# Altium PCB MCU_PCB_1.PcbDoc
Units mil, origin at the board's own origin, x right, y up, seen from the top; angles counter-clockwise.
Board outline 2799.21 x 3602.36 mil, 4 copper layers (Top Layer, Plane (+3.3V), Plane (GND), Bottom Layer), stack 23.756 mil thick; 72 components, 40 nets, 258 pads, 91 vias.
Unrouted connection lines stored in the file: 2.
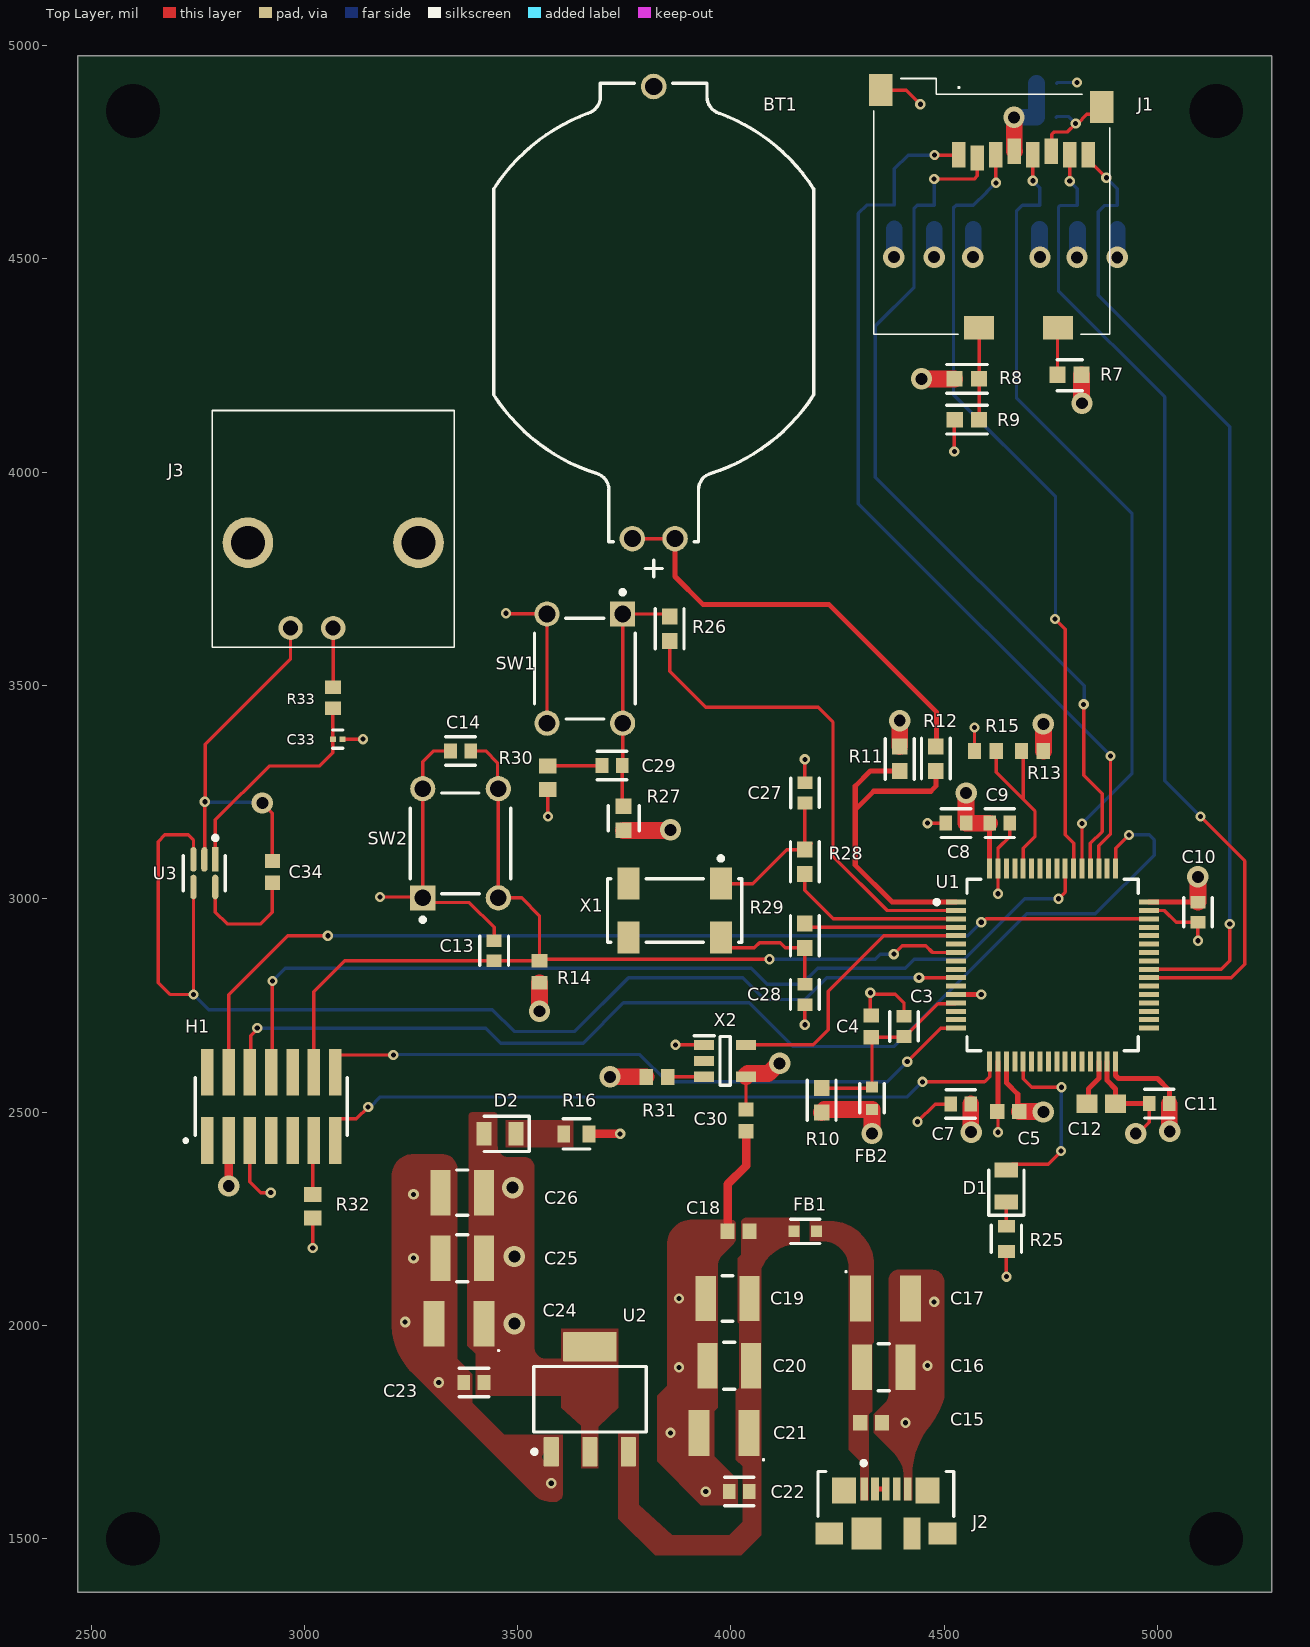
[diagram p0: Top Layer view]
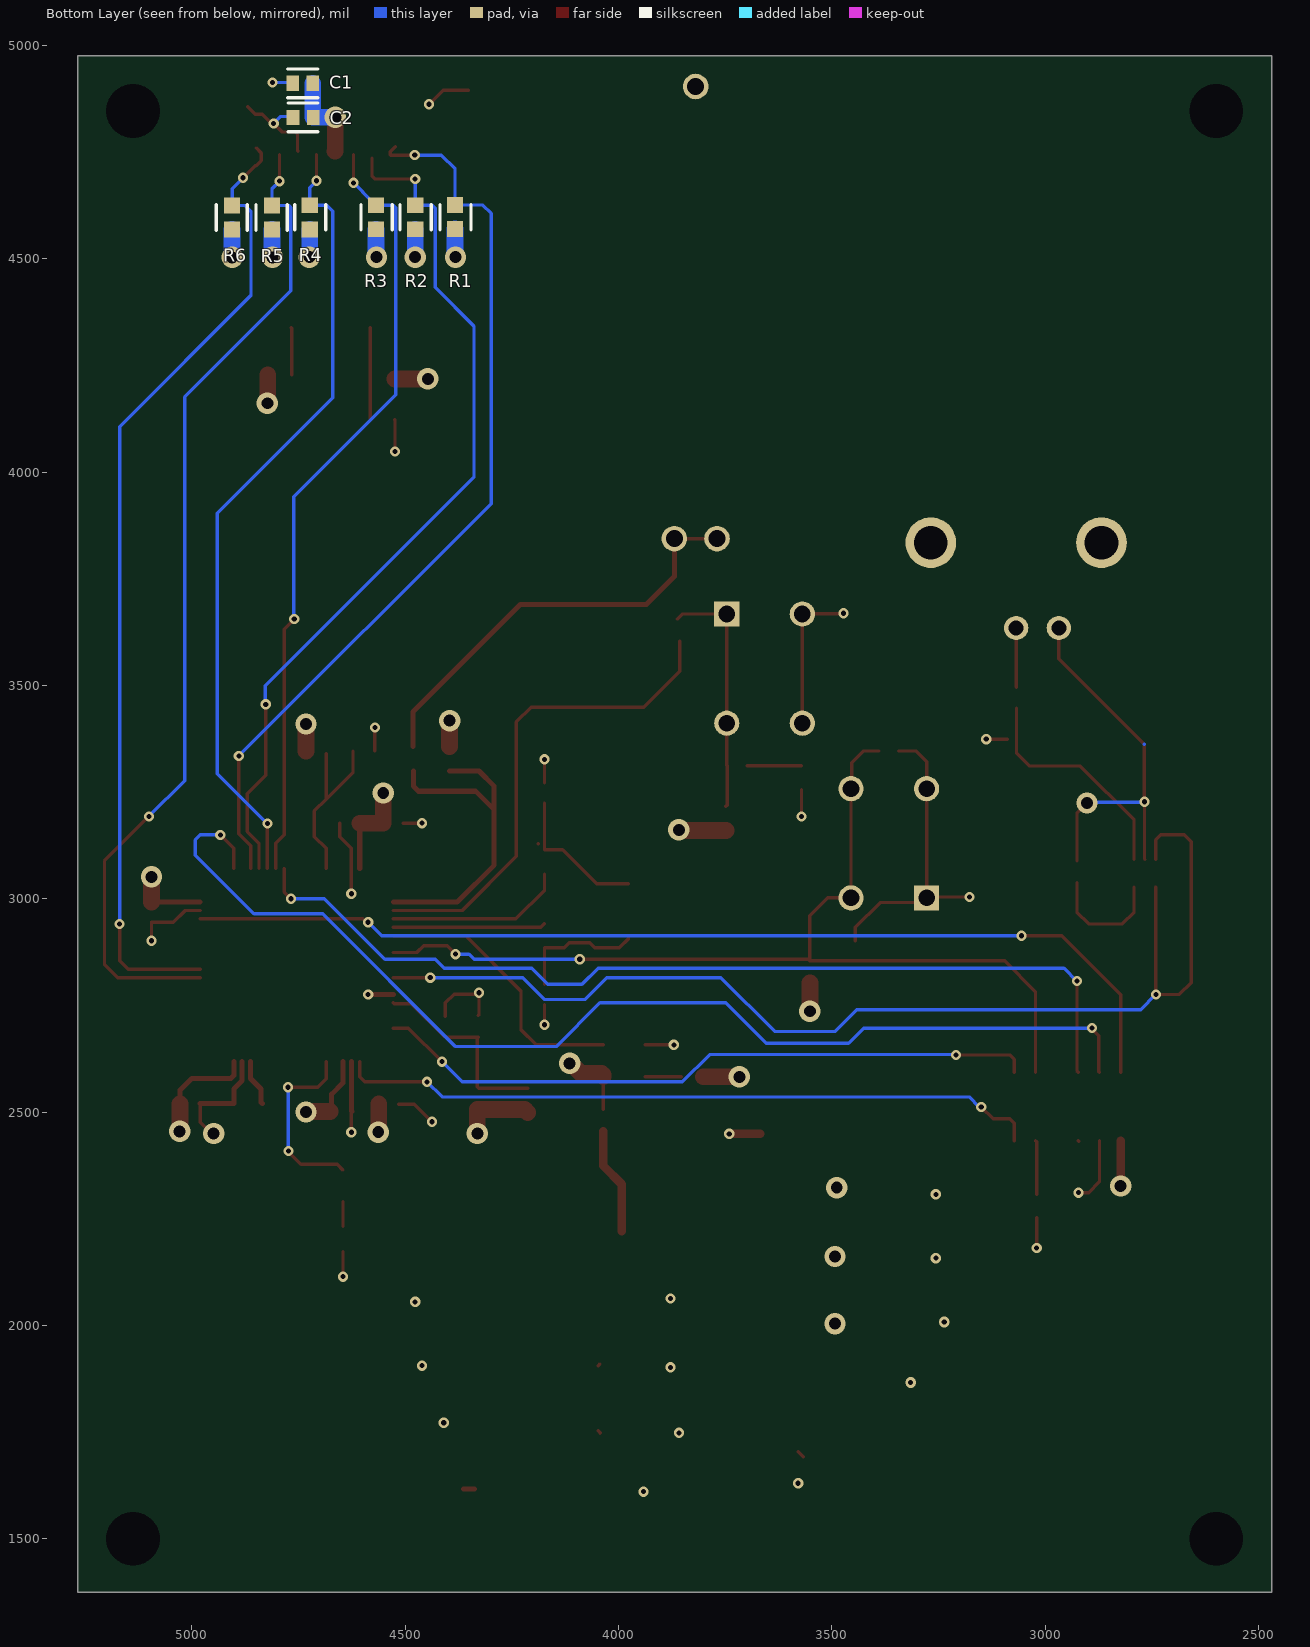
[diagram p1: Bottom Layer view, seen from below]
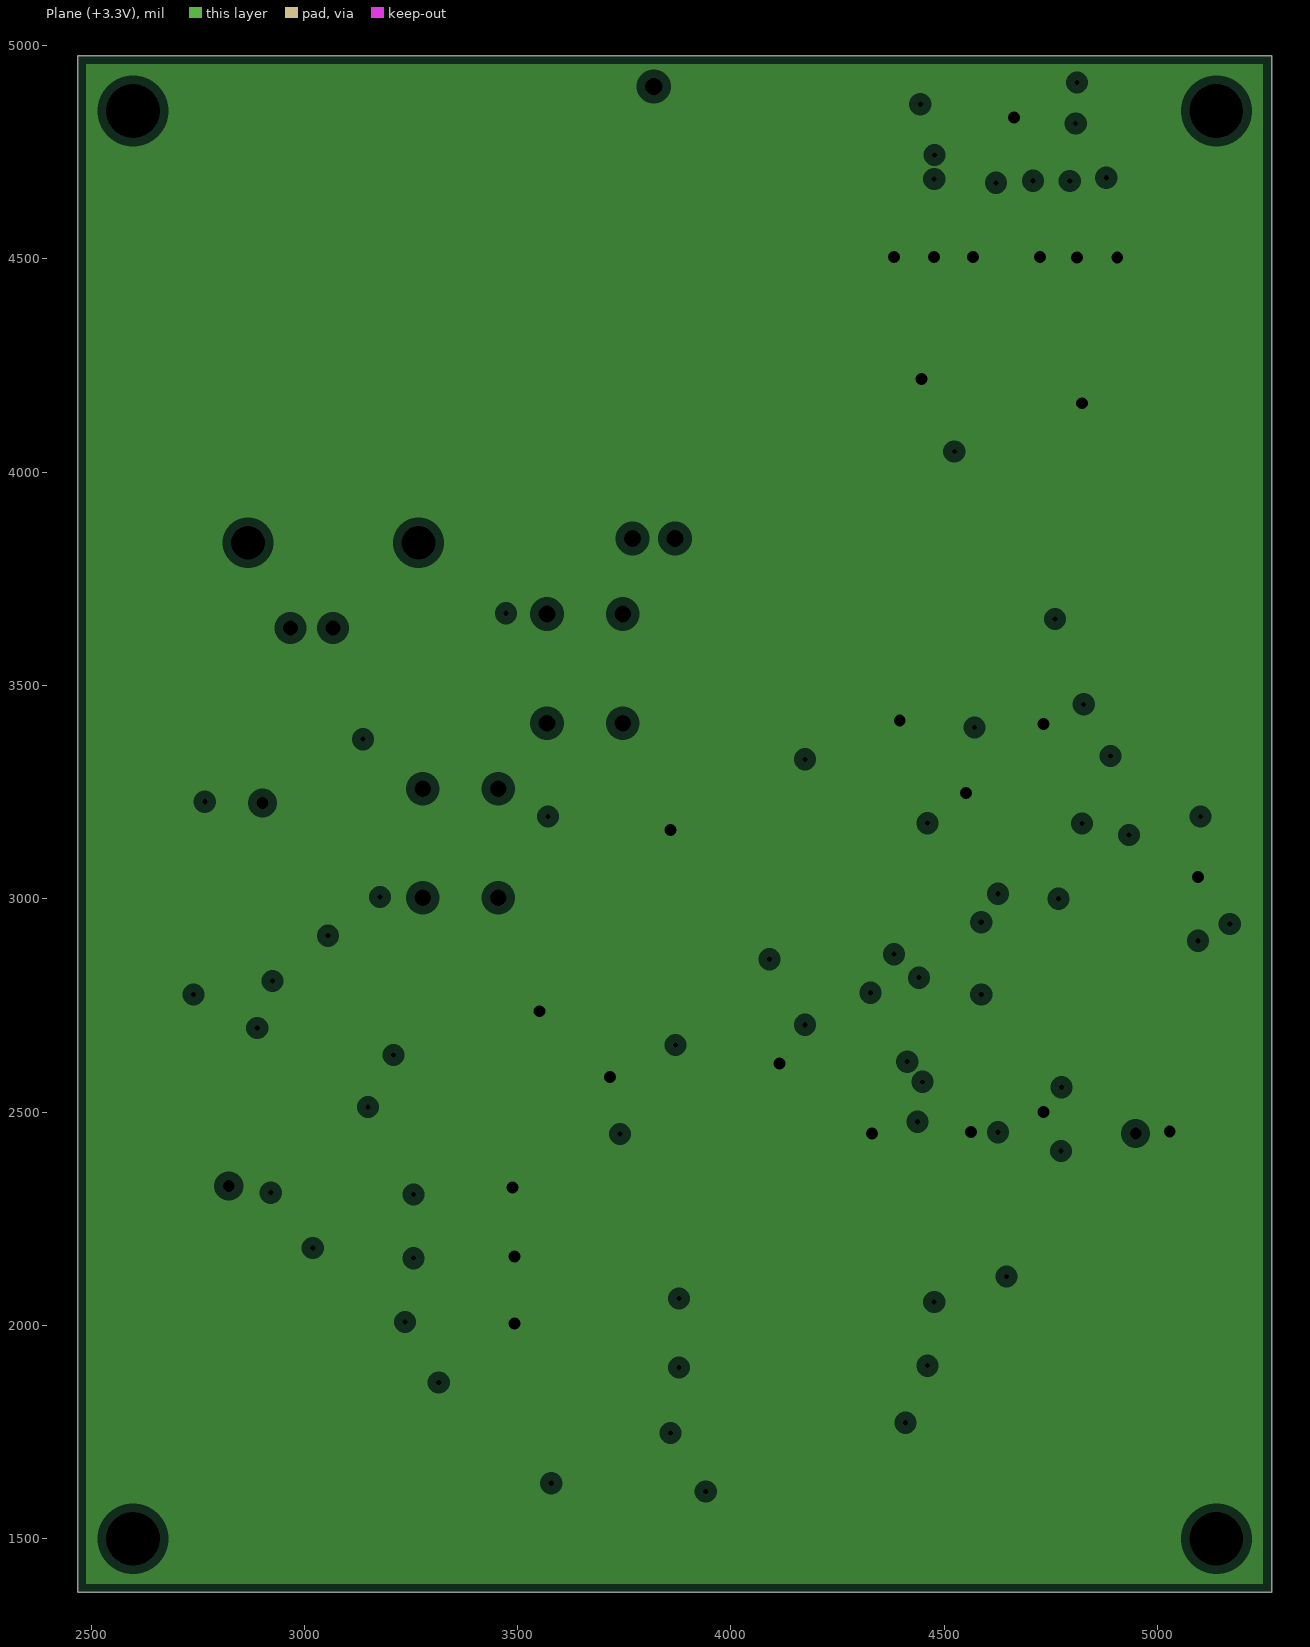
[diagram p2: Plane (+3.3V), clearances drawn from the general rule]
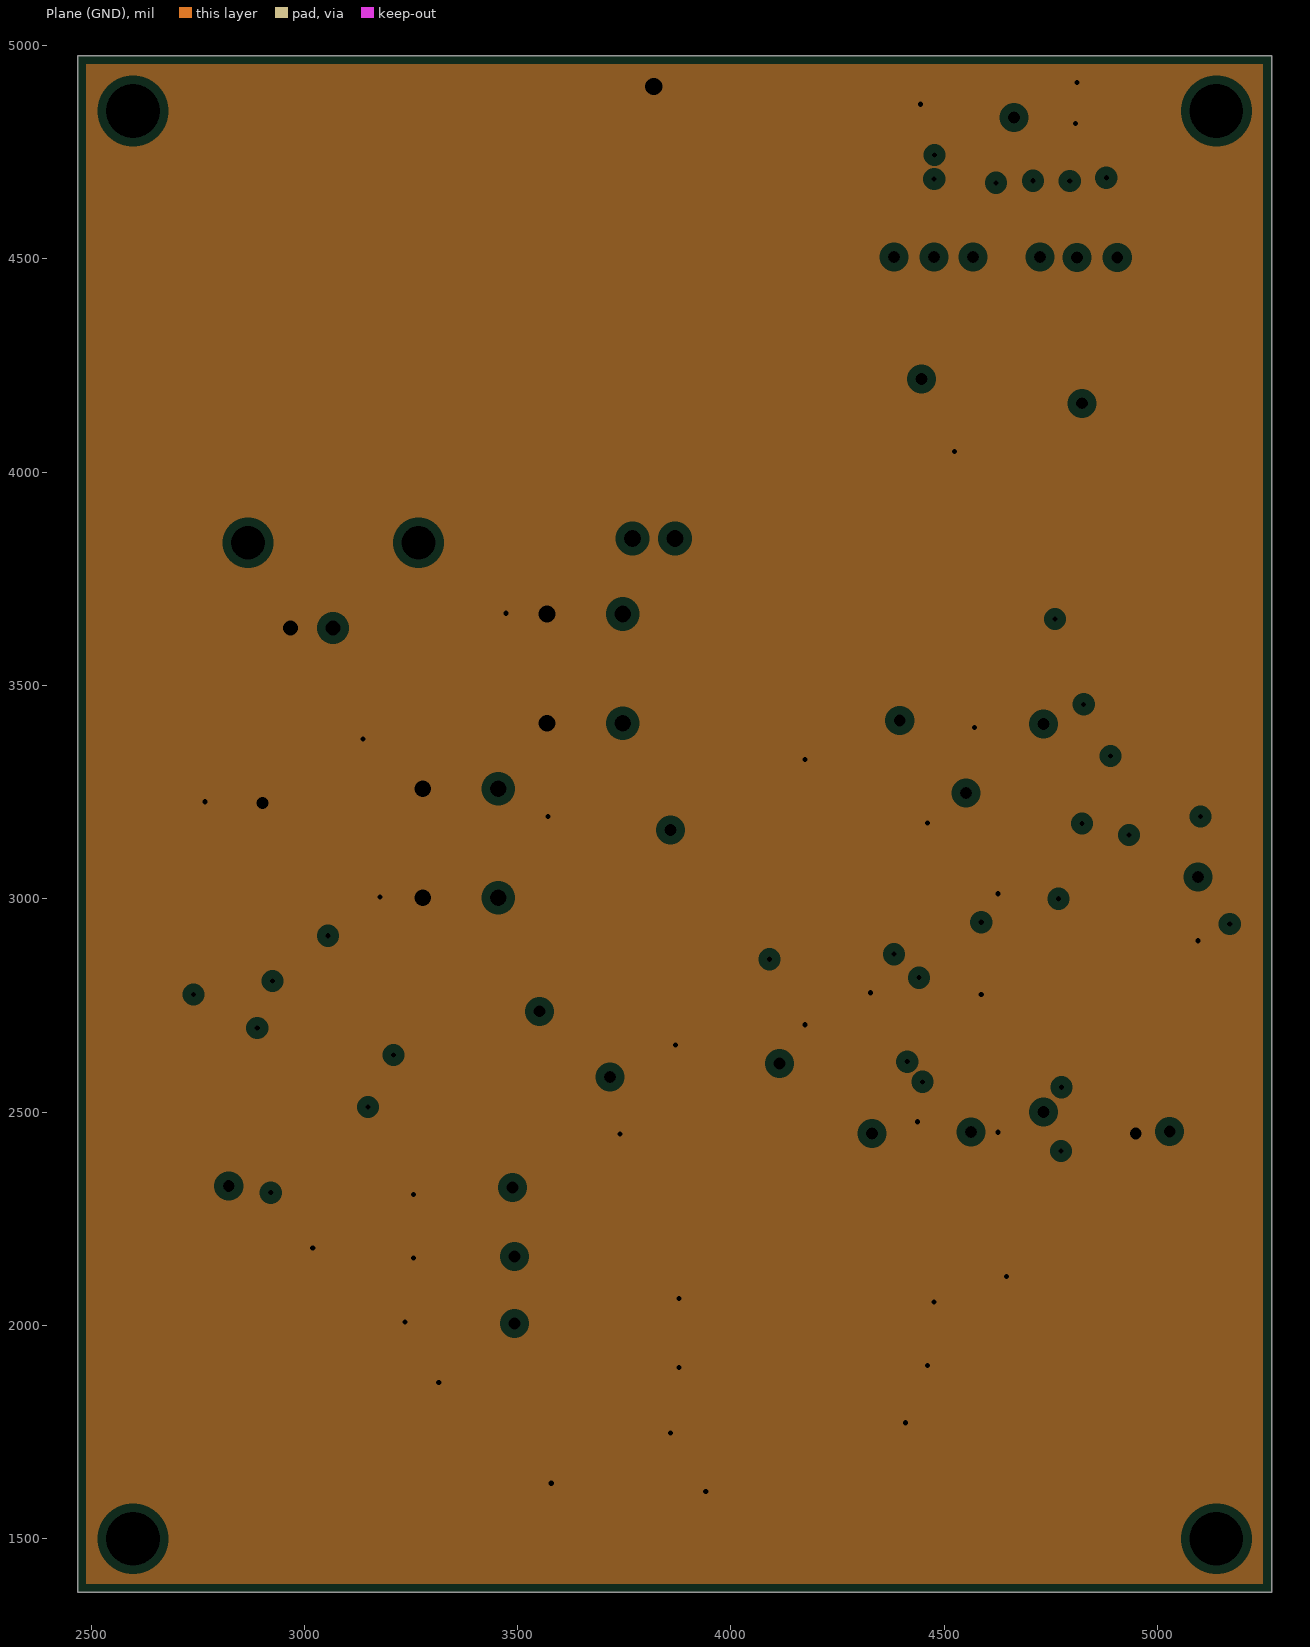
[diagram p3: Plane (GND), clearances drawn from the general rule]
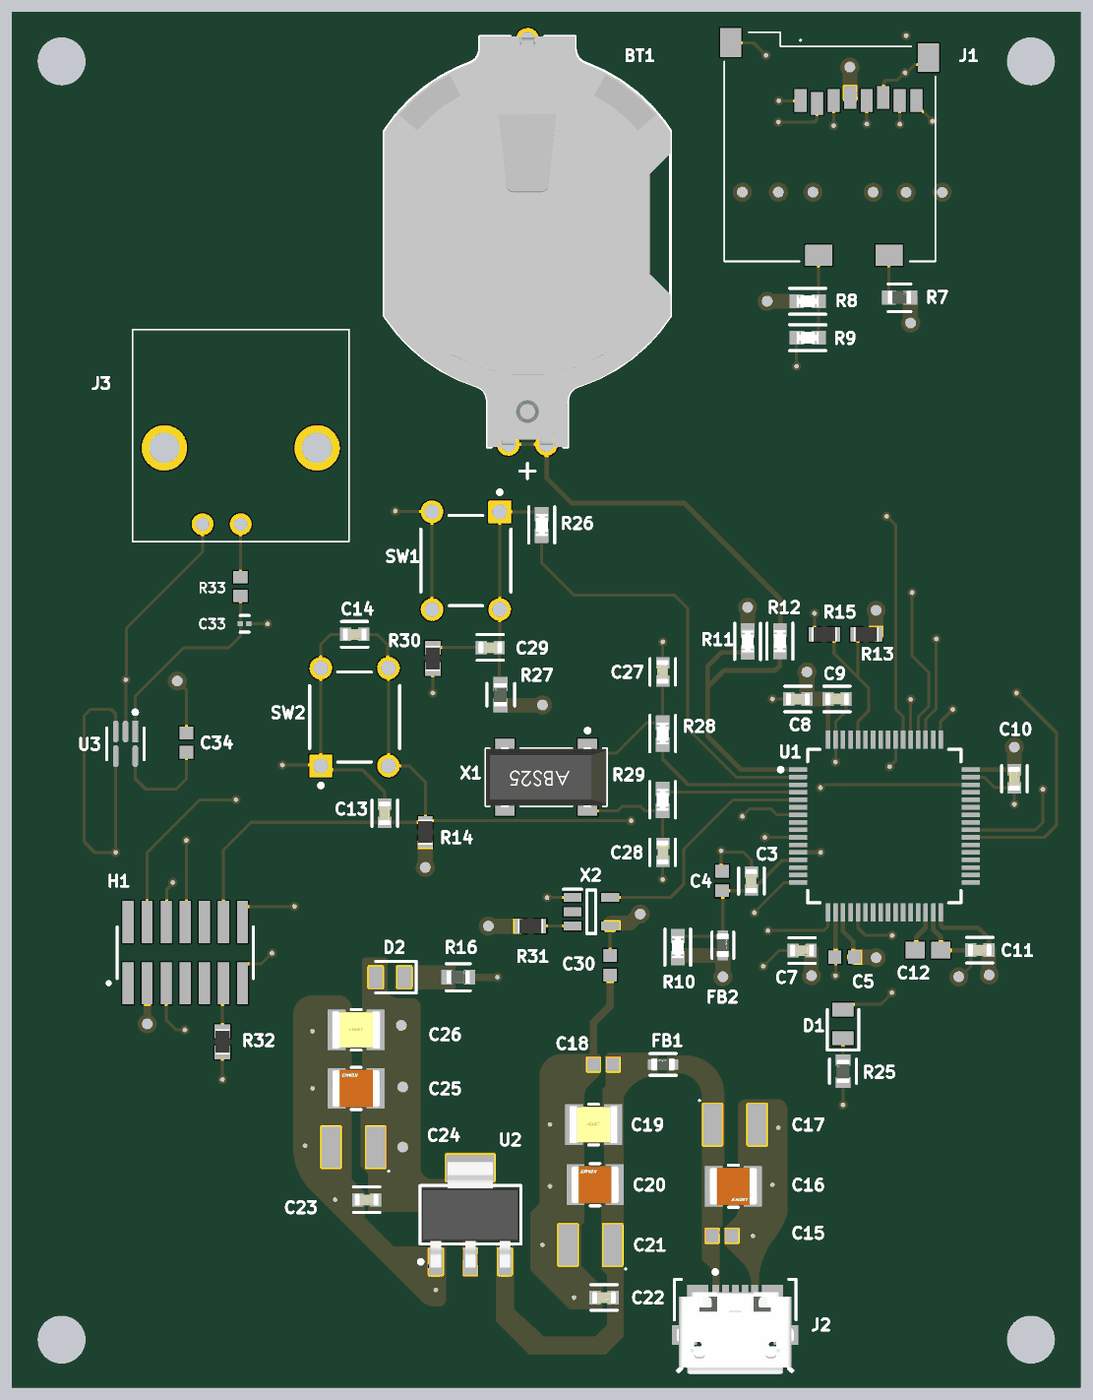
[diagram p4: 3D render of the assembled board from above, using the file's embedded part models]
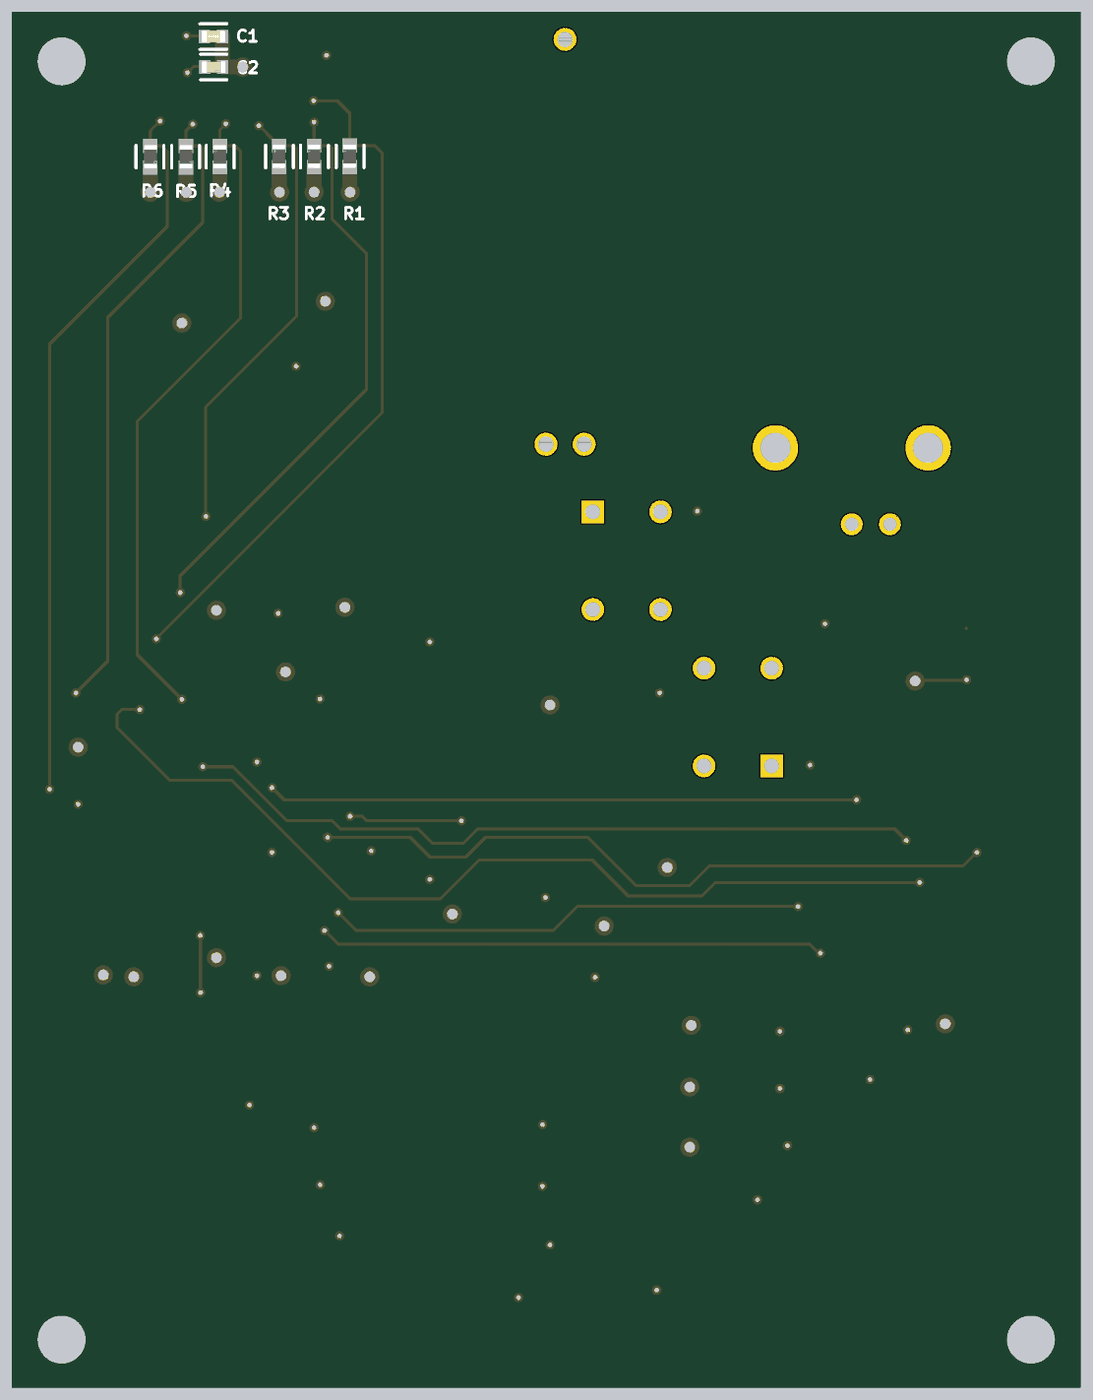
[diagram p5: 3D render of the assembled board from below, using the file's embedded part models]

## Layer stack, top to bottom
Top Solder: solder mask 0.4, Solder Resist, Dk 3.5
Top Layer: signal copper 1.4
Dielectric 2: prepreg 2.8, PP-006, Dk 4.1
Plane (+3.3V): plane copper 1.378, net +3.3V
Dielectric 1: dielectric 12.6, FR-4, Dk 4.8
Plane (GND): plane copper 1.378, net GND
Dielectric 3: prepreg 2.8, PP-006, Dk 4.1
Bottom Layer: signal copper 1.4
Bottom Solder: solder mask 0.4, Solder Resist, Dk 3.5

## Board outline
5267.72,1374.02 2468.5,1374.02 2468.5,4976.38 5267.72,4976.38

## Design rules (kind name [scope] priority, off if disabled: settings)
Clearance [All] p1: gap=5 ignorepadtopadclearanceinfootprint=FALSE
PlaneClearance [All] p1: clearance=20
PlaneConnect [All] p1: planeconnectstyle=Direct reliefexpansion=20 reliefentries=4 reliefconductorwidth=10 reliefairgap=10
PolygonConnect [All] p1: connectstyle=Direct reliefconductorwidth=10 reliefentries=4 polygonreliefangle="90 Angle" airgapwidth=10
RoutingVias [All] p1: holewidth=28 width=50 viastyle="Through Hole" minholewidth=28 minwidth=50 maxholewidth=28 maxwidth=50
SilkToSolderMaskClearance [IsPad] p1: minsilkscreentomaskgap=3 clearancetoexposedcopper=TRUE
SolderMaskExpansion [All] p1: expansion=3.94 istentingtop=FALSE
UnRoutedNet [All] p1: checkbadconnections=TRUE
Width [All] p1: maxlimit=39.37 minlimit=7.87 preferedwidth=19.68 minimp=50.000000 maximp=50.000000 favimp=50.000000
26 further rules are at their usual default settings.

## Classes and differential pairs
component class sensors: C33 C34 J3 R33 U3
component class power: BT1 C3 C4 C5 C7 C8 C9 C10 C11 C12 C13 C14 C15 C16 C17 C18 C19 C20 C21 C22 C23 C24 C25 C26 D2 FB1 FB2 J2 R10 R11 R12 R13 R14 R15 R16 SW2 U2
component class microSD_reader: C1 C2 J1 R1 R2 R3 R4 R5 R6 R7 R8 R9
component class MCU: C27 C28 C29 C30 D1 H1 R25 R26 R27 R28 R29 R30 R31 R32 SW1 U1 X1 X2

## Components (designator, comment, footprint, x,y, rotation, side; value= is the part's Value field where it differs from the comment)
BT1 "120591-1" TECO-120591-1-2_V 3818.9,4374.02 r90 top
C1 "C0603C106M8PACTU" FP-C0603C106M8PACTU-MFG 4740.16,4911.42 r0 bottom
C2 "C0603C104K5RAC7082" FP-C0603C-CF-MFG 4739.17,4831.69 r0 bottom value="0.10 μF"
C3 "C0603C104K5RAC7082" FP-C0603C-CF-MFG 4405.51,2700.79 r90 top value="0.10 μF"
C4 "C0603C105M8PACTU" CAPC1608X90X35LL15T15 4328.74,2700.79 r270 top
C5 "C0603C225M8PACTU" CAPC1608X90X35LL15T15 4650.1,2501.48 r180 top
C7 "C0603C104K5RAC7082" FP-C0603C-CF-MFG 4538.39,2518.7 r180 top value="0.10 μF"
C8 "C0603C104K5RAC7082" FP-C0603C-CF-MFG 4527.56,3177.17 r180 top value="0.10 μF"
C9 "C0603C104K5RAC7082" FP-C0603C-CF-MFG 4629.92,3177.17 r0 top value="0.10 μF"
C10 "C0603C104K5RAC7082" FP-C0603C-CF-MFG 5094.49,2968.5 r270 top value="0.10 μF"
C11 "C0603C104K5RAC7082" FP-C0603C-CF-MFG 5003.94,2519.68 r180 top value="0.10 μF"
C12 "C0603C475M8PACTU" CAPC1608X90X35ML15T15 4868.11,2519.68 r0 top
C13 "C0603C104K5RAC7082" FP-C0603C-CF-MFG 3444.88,2877.95 r90 top value="0.10 μF"
C14 "C0603C104K5RAC7082" FP-C0603C-CF-MFG 3366.14,3346.46 r180 top value="0.10 μF"
C15 "C0603C225M8PACTU" CAPC1608X90X35LL15T15 4328.74,1771.65 r0 top
C16 "C1210C107M9PACTU" FP-C1210C107M9PACTU-MFG 4358.27,1901.58 r0 top
C17 "C1210C476M9PACTU" CAPC3225X280 4362.2,2062.99 r0 top
C18 "C0603C225M8PACTU" CAPC1608X90X35LL15T15 4017.72,2220.47 r180 top
C19 "C1210C226K4PACTU" FP-C1210C226K4PACTU-MFG 3992.13,2062.99 r0 top
C20 "C1210C107M9PACTU" FP-C1210C107M9PACTU-MFG 3996.06,1905.51 r180 top
C21 "C1210C476M9PACTU" CAPC3225X280 3983.66,1748.03 r180 top
C22 "C0603C104K5RAC7082" FP-C0603C-CF-MFG 4019.69,1610.24 r180 top value="0.10 μF"
C23 "C0603C104K5RAC7082" FP-C0603C-CF-MFG 3397.64,1866.14 r180 top value="0.10 μF"
C24 "C1210C476M9PACTU" CAPC3225X280 3362.8,2003.94 r180 top
C25 "C1210C107M9PACTU" FP-C1210C107M9PACTU-MFG 3370.08,2157.48 r180 top
C26 "C1210C226K4PACTU" FP-C1210C226K4PACTU-MFG 3370.08,2311.02 r0 top
C27 "C0603C439C5GACTU" FP-C0603C-CF-MFG 4173.23,3248.03 r90 top value="4.3 pF"
C28 "C0603C439C5GACTU" FP-C0603C-CF-MFG 4173.23,2775.59 r270 top value="4.3 pF"
C29 "C0603C104K5RAC7082" FP-C0603C-CF-MFG 3721.46,3312.01 r180 top value="0.10 μF"
C30 "C0603C105M8PACTU" CAPC1608X90X35LL15T15 4035.43,2480.32 r270 top
C33 "C0201C101K3GACTU" FP-C0201-AB-MFG 3077.95,3374.02 r0 top value="100 pF"
C34 "C0603C105M8PACTU" CAPC1608X90X35LL15T15 2925.2,3062.99 r270 top
D1 "APT2012CGCK" LEDC2012X50N 4645.67,2326.77 r90 top
D2 "APT2012CGCK" LEDC2012X50N 3458.66,2448.82 r180 top
FB1 "BLM18AG601SN1D" FP-BLM18-0_15-t0_8-MFG 4174.21,2220.47 r180 top
FB2 "BLM18AG601SN1D" FP-BLM18-0_15-t0_8-MFG 4330.71,2532.48 r90 top
H1 "SAMTEC-FTSH-107-01-X-DVJ" SAMTEC_FTSH-107-01-F-DV-K-P-TR 2922.44,2513.19 r0 top
J1 "1660" 1660 4610.24,4622.05 r0 top
J2 "473460001" FP-473460001-MFG 4363.19,1525.59 r0 top
J3 "031-5431-10RFX" 031543110RFX 2967.72,3634.65 r0 top
R1 "CRCW060347K0FKEA" FP-CRCW0603-e3-IPC_B 4382.87,4597.82 r90 bottom
R2 "CRCW060347K0FKEA" FP-CRCW0603-e3-IPC_B 4476.38,4597.44 r90 bottom
R3 "CRCW060347K0FKEA" FP-CRCW0603-e3-IPC_B 4567.91,4597.44 r90 bottom
R4 "CRCW060347K0FKEA" FP-CRCW0603-e3-IPC_B 4723.43,4597.06 r90 bottom
R5 "CRCW060347K0FKEA" FP-CRCW0603-e3-IPC_B 4812.01,4596.83 r270 bottom
R6 "CRCW060347K0FKEA" FP-CRCW0603-e3-IPC_B 4905.51,4596.83 r270 bottom
R7 "CRCW060347K0FKEA" FP-CRCW0603-e3-IPC_B 4793.68,4228.35 r0 top
R8 "CRCW06030000Z0EAC" FP-CRCW0603-C-IPC_B 4553.07,4218.5 r180 top
R9 "CRCW06030000Z0EAC" FP-CRCW0603-C-IPC_B 4553.19,4122.99 r0 top
R10 "CRCW06030000Z0EAC" FP-CRCW0603-C-IPC_B 4212.6,2527.56 r90 top
R11 "CRCW06030000Z0EAC" FP-CRCW0603-C-IPC_B 4395.67,3327.83 r270 top
R12 "CRCW06030000Z0EAC" FP-CRCW0603-C-IPC_B 4480.31,3328.44 r270 top
R13 "CRCW060310K0FKEA" RESC1609X50X30NL8T20 4706.69,3346.46 r0 top
R14 "CRCW060310K0FKEA" RESC1609X50X30NL8T20 3551.18,2828.74 r270 top
R15 "CRCW060310K0FKEA" RESC1609X50X30NL8T20 4596.46,3346.46 r0 top
R16 "CRCW06031K00FKEA" FP-CRCW0603-e3-MFG 3637.8,2448.82 r0 top
R25 "CRCW06031K00FKEA" FP-CRCW0603-e3-MFG 4645.67,2202.76 r90 top
R26 "CRCW06030000Z0EAC" FP-CRCW0603-C-IPC_B 3856.38,3632.87 r90 top
R27 "CRCW060347K0FKEA" FP-CRCW0603-e3-IPC_B 3748.03,3188.37 r90 top
R28 "CRCW06030000Z0EAC" FP-CRCW0603-C-IPC_B 4173.23,3086.61 r90 top
R29 "CRCW06030000Z0EAC" FP-CRCW0603-C-IPC_B 4173.23,2913.39 r270 top
R30 "CRCW0603100RFKEA" RESC1609X50X30ML8T20 3570.87,3283.46 r270 top
R31 "CRCW060310K0FKEA" RESC1609X50X30NL8T20 3826.77,2582.68 r180 top
R32 "CRCW0603100RFKEA" RESC1609X50X30ML8T20 3019.68,2279.53 r270 top
R33 "CRCW06031K58FKEA" RESC1609X50X30NL10T20 3066.93,3471.46 r270 top
SW1 "1825910-6" TECO-1825910-6_V 3657.48,3539.37 r270 top
SW2 "1825910-6" TECO-1825910-6_V 3366.14,3129.92 r90 top
U1 "STM32F446RET6" FP-LQFP64-5W-MFG 4753.94,2844.49 r0 top
U2 "TLV1117LV33DCYR" DCY0004A_N 3669.29,1826.77 r90 top
U3 "LM321LVIDCKR" FP-DCK0005A-IPC_B 2765.75,3059.85 r270 top
X1 "ABS25-32.768KHZ-6-T" ABRA-ABS25-4_V 3868.11,2972.44 r180 top
X2 "SiT2024BA-S2-33E-8.000000G" SOT95P280X145-5N 3986.22,2620.08 r0 top

## Footprints (in the part's own frame and the unit in brackets; to place one, negate y for a bottom-side part, rotate by r counter-clockwise, add the part's x,y. Pads: shape width x height; smd on the part's side, far side on the other; paste and mask are expansions set on the pad)
1660 [mm]
  rect 0.8x1.5 smd: 1(-1.925,3.1) 2(-0.825,2.9) 3(0.275,3.1) 4(1.375,3.3) 5(2.475,3.1) 6(3.575,3.3) 7(4.675,3.1) 8(5.775,3.1)
  rect 1.8x1.4 smd: 9(3.975,-7.2) 10(-0.725,-7.2)
  rect 1.4x1.9 smd: 11(-6.575,6.95) 12(6.575,5.95)
  silkscreen extent -7,-7.6 7.05,7.64
031543110RFX [mm]
  round 1.446 hole 0.89: 1(0,0) 2(2.54,0)
  round 3.015 hole 2.01: 3(7.62,5.08) 4(-2.54,5.08)
  silkscreen extent -4.66,-1.15 9.74,12.95
ABRA-ABS25-4_V [mm] "SMD, 4-Leads, Body 8x3.8mm, Pitch 5.5mm, Height 2.5mm"
  rect 1.3x1.9 smd: 1(-2.75,-1.6) 2(2.75,-1.6) 3(2.75,1.6) 4(-2.75,1.6)
  silkscreen extent -4,-3.22 4,1.9, body extent -4,-2 4,2, height 2.66
CAPC1608X90X35LL15T15 [mm] "Chip Capacitor, 2-Leads, Body 1.60x0.81mm, IPC High Density"
  rect 0.85x0.9 smd: 1(-0.65,0) 2(0.65,0)
  body extent -0.88,-0.48 0.87,0.48, height 0.9
CAPC1608X90X35ML15T15 [mm] "Chip Capacitor, 2-Leads, Body 1.60x0.81mm, IPC Low Density"
  rect 1.25x1.1 smd: 1(-0.85,0) 2(0.85,0)
  body extent -0.88,-0.48 0.87,0.48, height 0.9
CAPC3225X280 [mm]
  rect 1.24x2.73 smd: 1(-1.485,0) 2(1.485,0)
  silkscreen extent -2.4,1.55 -2.3,1.65
DCY0004A_N [mm] "SOT223, 4-Leads, Body 6.7x3.7mm, Pitch 2.3mm, IPC Medium Density"
  rrect11% 1.75x0.9 smd: 1(-3.125,2.3) 2(-3.125,0) 3(-3.125,-2.3)
  rrect6% 1.75x3.2 smd: 4(3.125,0)
  silkscreen extent -3.25,-3.35 1.95,3.42, body extent -3.5,-3.25 3.5,3.25, height 1.62
FP-473460001-MFG [mm]
  rect 0.45x1.38 smd paste+0 mask+0: 1(-1.3,2.31) 2(-0.65,2.31) 3(0,2.31) 4(0.65,2.31) 5(1.3,2.31)
  rect 1.425x1.55 smd paste+0 mask+0: 6(-2.488,2.225) 7(2.488,2.225)
  rect 1.65x1.3 smd paste+0 mask+0: 8(-3.375,-0.35) 11(3.375,-0.35)
  rect 1.8x1.9 smd paste+0 mask+0: 9(-1.15,-0.35)
  rect 1x1.9 smd paste+0 mask+0: 10(1.55,-0.35)
  silkscreen extent -4.05,0.67 4.05,3.97, body extent -4.3,-2.48 4.3,3.45, height 0.25
FP-BLM18-0_15-t0_8-MFG [mm]
  rect 0.65x0.7 smd paste+0 mask+0: 1(-0.675,0) 2(0.675,0)
  silkscreen extent -0.87,-0.73 0.87,0.73, body extent -1.1,-0.58 1.1,0.58, height 0.25
FP-C0201-AB-MFG [mm]
  rect 0.36x0.32 smd paste+0 mask+0: 1(-0.28,0) 2(0.28,0)
  silkscreen extent -0.3,-0.55 0.3,0.55
FP-C0603C106M8PACTU-MFG [mm]
  rect 0.75x0.9 smd paste+0 mask+0: 1(-0.6,0) 2(0.6,0)
  silkscreen extent -0.9,-0.85 0.9,0.85, body extent -0.8,-0.4 0.8,0.4, height 1
FP-C0603C-CF-MFG [mm]
  rect 0.75x0.9 smd paste+0 mask+0: 1(-0.6,0) 2(0.6,0)
  silkscreen extent -0.87,-0.85 0.88,0.85, body extent -0.8,-0.4 0.8,0.4, height 0.87
FP-C1210C107M9PACTU-MFG [mm]
  rect 1.2x2.7 smd paste+0 mask+0: 1(-1.3,0) 2(1.3,0)
  silkscreen extent -0.33,-1.4 0.33,1.4, body extent -2,-1.5 2,1.5, height 0.25
FP-C1210C226K4PACTU-MFG [mm]
  rect 1.2x2.7 smd paste+0 mask+0: 1(-1.3,0) 2(1.3,0)
  silkscreen extent -0.33,-1.35 0.33,1.35, body extent -2,-1.5 2,1.5, height 0.25
FP-CRCW0603-C-IPC_B [mil]
  rect 37.72x35.91 smd paste+0 mask+0: 1(-28.62,0) 2(28.62,0)
  silkscreen extent -47,-34 47,34, body extent -57,-28 57,28, height 10
FP-CRCW0603-e3-IPC_B [mil]
  rect 36.81x37.88 smd paste+0 mask+0: 1(-28.17,0) 2(28.17,0)
  silkscreen extent -30,-37 30,35, body extent -31,-17 31,17, height 20
FP-CRCW0603-e3-MFG [mm]
  rect 0.75x1 smd paste+0 mask+0: 1(-0.75,0) 2(0.75,0)
  silkscreen extent -0.8,-0.9 0.8,0.9, body extent -1.22,-0.6 1.22,0.6, height 0.25
FP-DCK0005A-IPC_B [mm]
  rect 1.464x0.376 smd paste+0 mask+0: 1(-0.82,0.65)
  rrect100% 1.464x0.376 smd paste+0 mask+0: 2(-0.82,0) 3(-0.82,-0.65) 4(0.82,-0.65) 5(0.82,0.65)
  silkscreen extent -2.23,-1.25 1.05,1.25
FP-LQFP64-5W-MFG [mm]
  rect 1.2x0.3 smd paste+0 mask+0: 1(-5.75,3.75) 2(-5.75,3.25) 3(-5.75,2.75) 4(-5.75,2.25) 5(-5.75,1.75) 6(-5.75,1.25) 7(-5.75,0.75) 8(-5.75,0.25) 9(-5.75,-0.25) 10(-5.75,-0.75) 11(-5.75,-1.25) 12(-5.75,-1.75) 13(-5.75,-2.25) 14(-5.75,-2.75) 15(-5.75,-3.25) 16(-5.75,-3.75) 33(5.75,-3.75) 34(5.75,-3.25) 35(5.75,-2.75) 36(5.75,-2.25) 37(5.75,-1.75) 38(5.75,-1.25) 39(5.75,-0.75) 40(5.75,-0.25) 41(5.75,0.25) 42(5.75,0.75) 43(5.75,1.25) 44(5.75,1.75) 45(5.75,2.25) 46(5.75,2.75) 47(5.75,3.25) 48(5.75,3.75)
  rect 0.3x1.2 smd paste+0 mask+0: 2(-1.75,5.75) 17(-3.75,-5.75) 18(-3.25,-5.75) 19(-2.75,-5.75) 20(-2.25,-5.75) 21(-1.75,-5.75) 22(-1.25,-5.75) 23(-0.75,-5.75) 24(-0.25,-5.75) 25(0.25,-5.75) 26(0.75,-5.75) 27(1.25,-5.75) 28(1.75,-5.75) 29(2.25,-5.75) 30(2.75,-5.75) 31(3.25,-5.75) 32(3.75,-5.75) 49(3.75,5.75) 50(3.25,5.75) 51(2.75,5.75) 52(2.25,5.75) 53(1.75,5.75) 54(1.25,5.75) 55(0.75,5.75) 56(0.25,5.75) 57(-0.25,5.75) 58(-0.75,5.75) 59(-1.25,5.75) 61(-2.25,5.75) 62(-2.75,5.75) 63(-3.25,5.75) 64(-3.75,5.75)
  silkscreen extent -7.02,-5.1 5.1,5.1
LEDC2012X50N [mm]
  rect 0.9x1.4 smd: 1(-0.95,0) 2(0.95,0)
  silkscreen extent -1.75,-1.05 0.95,1.05
RESC1609X50X30ML8T20 [mm] "Chip Resistor, 2-Leads, Body 1.65x0.95mm, IPC Low Density"
  rect 0.9x1.05 smd: 1(-0.7,0) 2(0.7,0)
  body extent -0.82,-0.48 0.82,0.48, height 0.5
RESC1609X50X30NL8T20 [mm] "Chip Resistor, 2-Leads, Body 1.65x0.95mm, IPC Medium Density"
  rect 0.8x0.95 smd: 1(-0.65,0) 2(0.65,0)
  body extent -0.82,-0.48 0.82,0.48, height 0.5
RESC1609X50X30NL10T20 [mm] "Chip Resistor, 2-Leads, Body 1.55x0.85mm, IPC Medium Density"
  rect 0.8x0.95 smd: 1(-0.625,0) 2(0.625,0)
  body extent -0.82,-0.48 0.82,0.48, height 0.5
SAMTEC_FTSH-107-01-F-DV-K-P-TR [mm]
  rect 0.74x2.79 smd: 01(-3.81,-2.035) 02(-3.81,2.035) 03(-2.54,-2.035) 04(-2.54,2.035) 05(-1.27,-2.035) 06(-1.27,2.035) 07(0,-2.035) 08(0,2.035) 09(1.27,-2.035) 10(1.27,2.035) 11(2.54,-2.035) 12(2.54,2.035) 13(3.81,-2.035) 14(3.81,2.035)
  silkscreen extent -5.19,-2.13 4.53,1.72
SOT95P280X145-5N [mm]
  rect 1.2x0.6 smd: 1(-1.25,0.95) 2(-1.25,0) 3(-1.25,-0.95) 4(1.25,-0.95) 5(1.25,0.95)
  silkscreen extent -1.85,-1.45 0.3,1.5
TECO-120591-1-2_V [mm] "Lithium Battery Holder"
  round 1.52 hole 1.02: 1(-13.46,-1.27) 1(-13.46,1.27) 2(13.46,0)
  silkscreen extent -15.74,-9.53 13.65,9.53, body extent -13.65,-9.52 13.66,9.52, height 6.41
TECO-1825910-6_V [mm] "Switch, 4-Leads, Body 5.99x5.99mm"
  rect 1.5x1.5 hole 0.99: 1(-3.25,2.25)
  round 1.5 hole 0.99: 2(3.25,2.25) 3(-3.25,-2.25) 4(3.25,-2.25)
  silkscreen extent -4.67,-3 3,3, body extent -3,-2.99 2.99,3, height 5

## Part data
BT1: library part CMP-0438-00001-2, "Lithium Battery Holder for CR2032 3V Cell", Manufacturer="TE Connectivity", AccessRights=2147483647, Body Shape="Horizontal Cylindrical", ComponentLink1Description="Manufacturer URL", ComponentLink1URL=http://www.te.com/, ComponentLink2Description=Datasheet, ComponentLink2URL=http://www.te.com/commerce/DocumentDelivery/DDEController?Action=showdoc&DocId=Customer+Drawing%7F120591%7FH%7Fpdf%7FEnglish%7FENG_CD_120591_H.pdf%7F120591-1, ContentType="Unified Component", ContentTypeGUID=CB3C11C4-E317-11DF-B822-12313F0024A2, DatasheetVersion="Rev. H, 01/2013", Folder="Unified Components\Components\TE Connectivity\Connectors & Connector Components\Power Products\Battery Interconnection Products\", FolderGUID=A6761B51-D489-48A3-9180-F4808F45AB79, ItemGUID=B2C50140-681E-4F62-8DBB-9728605318CE, ItemHRID=CMP-0438-00001, LifeCycle=Released, LifeCycleStateGUID=61E382EE-6656-4F12-9E24-BE9327104A25, Mounting Technology="Through Hole", PackageDescription="Lithium Battery Holder", PackageReference=120591-1, Packing Type=Tray, PartNumber=120591-1, ReleaseDate="20/08/2013 02:50:22 AM", RevisionId=1
C1: library part CMP-03020-034654-1, "CAP CER 10UF 10V X5R 0603", RoHS Compliant=Yes
C2 C3 C7 C8 C9 C10 C11 C13 C14 C22 C23 C29: library part CMP-03020-002411-2, "C0603 0.10 μF X7R 30ppm/°C 10.00% 50 V", Capacitance="0.10 μF", Manufacturer=KEMET, Package=C0603C-CF, Temperature="-55°C to +125°C", Temperature Characteristic=X7R, Temperature Coefficient=30ppm/°C, Temperature Range High=+125°C, Temperature Range Low=-55°C, Tolerance=0.1, Voltage Rating="50 V", Automotive=Yes, Automotive Grade="Grade 1", Category=Cap, ComponentLink2Description=Datasheet, ComponentLink2URL=https://api.kemet.com/component-edge/download/datasheet/C0603C100J5GACAUTO.pdf, Device Class L1="Passive Components", Device Class L2=Capacitors, Device Class L3="Ceramic Capacitors", Height=0.87mm, Lead Free=Yes, Manufacturer Part Number=C0603C104K5RAC7082, Material=Ceramic, Octopart=https://octopart.com/c0603c104k5rac7082-kemet-75146597, RoHS=TRUE
C4 C30 C34: library part CMP-2006-02271-1, Manufacturer=Kemet, Part Number=C0603C105M8PACTU
C5 C15 C18: library part CMP-2006-02273-1, Manufacturer=Kemet, Part Number=C0603C225M8PACTU
C12: library part CMP-2006-02263-1, Manufacturer=Kemet, Part Number=C0603C475M8PACTU
C16 C20 C25: library part CMP-2000-06018-2, "CAP CER 100UF 6.3V X5R 1210", Capacitance=100uF, Case Code (Imperial)=1210, Case Code (Metric)=3225, Dielectric=X5R, Dielectric Material=Ceramic, Max Operating Temperature=85°C, Min Operating Temperature=-55°C, Package Quantity=1, Tolerance=20%, Voltage=6.3V, Case/Package=1210, Construction=Flat, Contact Plating=Tin, Depth=2.5mm, Dissipation Factor=5%, Height=2.5mm, Lead Free="Lead Free", Length=3.2mm, Mount="Surface Mount", Number of Pins=2, Packaging="Tape and Reel", Radiation Hardening=No, REACH SVHC="No SVHC", RoHS Compliant=Yes, Series=C, Termination=SMD/SMT, Thickness=0.11inch, Voltage Rating=6.3V, Voltage Rating (DC)=6.3V, Width=2.5mm
C17 C21 C24: "CAP, MLCC, X5R, 47UF, 6.3V, 1210", Package=None, Availability=Unavailable, MP=C1210C476M9PACTU, Price=None
C19 C26: library part CMP-03020-034645-1, "CAP CER 22UF 16V X5R 1210", Capacitance=22uF, Case Code (Imperial)=1210, Case Code (Metric)=3225, Dielectric=X5R, Dielectric Material=Ceramic, Max Operating Temperature=85°C, Min Operating Temperature=-55°C, Tolerance=10%, Voltage=16V, Case/Package=1210, Construction=Flat, Depth=2.5mm, Height=1.85mm, Lead Free="Lead Free", Length=3.2mm, Mount="Surface Mount", Packaging="Tape and Reel", Radiation Hardening=No, RoHS Compliant=Yes, Termination=SMD/SMT, Voltage Rating=16V, Voltage Rating (DC)=16V
C27 C28: library part CMP-1035-00305-3, "CAP CER 4.3PF 50V NP0 0603", Capacitance="4.3 pF", Manufacturer=KEMET, Package=C0603C-CF, Temperature="-55°C to +125°C", Temperature Characteristic=C0G, Temperature Coefficient=30ppm/°C, Temperature Range High=+125°C, Temperature Range Low=-55°C, Tolerance="0.25 pF", Voltage Rating="50 V", Automotive=Yes, Automotive Grade="Grade 1", Category=Cap, ComponentLink2Description=Datasheet, ComponentLink2URL=https://api.kemet.com/component-edge/download/datasheet/C0603C100J5GACAUTO.pdf, Device Class L1="Passive Components", Device Class L2=Capacitors, Device Class L3="Ceramic Capacitors", Digikey Description="CAP CER 4.3PF 50V NP0 0603", Height=0.87mm, Lead Free=Yes, Manufacturer Part Number=C0603C439C5GACTU, Material=Ceramic, Mouser Description="Capacitor, Ceramic, 4.3pF, 50VDC, .25-pF Tol, .25+pf Tol, C0G-TC Code, -30, 30ppm-TC", Octopart=https://octopart.com/c0603c439c5gactu-kemet-8375741, RoHS=TRUE
C33: library part CMP-03020-034480-1, "CAP CER 100PF 25V 5% NP0 0201", Capacitance="100 pF", Manufacturer=KEMET, Package=C0201-AB, Temperature="-55°C to +125°C", Temperature Characteristic=C0G, Temperature Coefficient=30ppm/°C, Temperature Range High=+125°C, Temperature Range Low=-55°C, Tolerance=0.1, Voltage Rating="25 V", Automotive=No, Category=Cap, ComponentLink2Description=Datasheet, ComponentLink2URL=https://content.kemet.com/datasheets/KEM_C1003_C0G_SMD.pdf, Device Class L1="Passive Components", Device Class L2=Capacitors, Device Class L3="Ceramic Capacitors", Digikey Description="CAP CER 100PF 25V 5% NP0 0201", Height=0.33mm, Ipc Land Pattern Name=CAPC6030X30, Lead Free=Yes, Manufacturer Part Number=C0201C101K3GACTU, Material=Ceramic, Mouser Description="Multilayer Ceramic Capacitors MLCC - SMD/SMT 25volts 100pF C0G 10%", Octopart=https://octopart.com/c0201c101k3gactu-kemet-17054818, RoHS=TRUE, Standoff Height=0mm
D1 D2: "Kingbright APT2012CGCK, APT2012 Series Green LED, 570 nm, 2012 (0805) Clear, Rectangle Lens SMD Package", Manufacturer_Name=Kingbright, Mouser Part Number=604-APT2012CGCK, Datasheet Link=https://componentsearchengine.com/Datasheets/1/APT2012CGCK.pdf, Geometry.Height=0.5mm, Manufacturer_Part_Number=APT2012CGCK, Mouser Price/Stock=https://www.mouser.co.uk/ProductDetail/Kingbright/APT2012CGCK?qs=VdjlWU%2FzoOEv1TxC2gMNzg%3D%3D
FB1 FB2: library part CMP-0686-00436-3, "Chip Ferrite Bead, 0603, 600Ω @ 100MHz, 0.38Ω, 25%, 500mA", Case Code (Imperial)=0603, Case Code (Metric)=1608, Current Rating=500mA, DC Resistance (DCR)=380mR, Frequency=100MHz, Max Operating Temperature=125°C, Min Operating Temperature=-55°C, Package Quantity=1, Tolerance=25%, Case/Package=0603, Core Material=Ferrite, DC Current=500mA, Depth=0.8mm, Height=0.8mm, Impedance=600R, Lead Free="Lead Free", Length=1.6mm, Material=Steel, Max Current Rating=500mA, Max DC Current=500mA, Military Standard=Not, Number of Circuits=1, Number of Lines=1, Number of Pins=2, Packaging="Tape and Reel", Radiation Hardening=No, REACH SVHC="No SVHC", RoHS Compliant=Yes, Shielding=Unshielded, Termination=SMD/SMT, Test Frequency=100MHz, Weight=7.1E-05oz, Width=0.8mm
J1: "Adafruit Accessories MIcroSD Socket", Manufacturer_Name=Adafruit, Mouser Part Number=485-1660, Datasheet Link=https://cdn-shop.adafruit.com/datasheets/15882.pdf, Geometry.Height=1mm, Manufacturer_Part_Number=1660, Mouser Price/Stock=https://www.mouser.co.uk/ProductDetail/Adafruit/1660?qs=GURawfaeGuCXDyGMVdt6Kw%3D%3D
J2: library part CMP-2000-05246-2, "CONN RCPT USB2.0 MICRO B SMD R/A", Current Rating=1.8A, Manufacturer=Molex, Package=0, Temperature="-30°C to +85°C", Temperature Range High=+85°C, Temperature Range Low=-30°C, Voltage Rating=30V, Automotive=No, Category=Conn, ComponentLink2Description=Datasheet, ComponentLink2URL=https://www.molex.com/webdocs/datasheets/pdf/en-us/0473460001_IO_CONNECTORS.pdf, Conn Orientation="Right Angle", Contact Material=Gold,Nickel, Device Class L1=Connectors, Device Class L2="USB Connectors", Device Class L3=unset, Digikey Description="CONN RCPT USB2.0 MICRO B SMD R/A", Footprint Url=https://www.molex.com/pdm_docs/sd/473460001_sd.pdf, Height=2.945mm, Is Female=yes, Lead Free=Yes, Manufacturer Part Number=473460001, Number Of Contacts=5, Octopart=https://octopart.com/47346-0001-molex-7164928, Pitch=0.65mm, RoHS=TRUE, Shielding=true, Usb Standard="USB 2.0"
J3: "Amphenol BNC Series Right Angle 50 Through Hole BNC Connector, jack, Nickel, Solder Termination", Manufacturer_Name=Amphenol, Mouser Part Number=523-31-5431-10RFX, Datasheet Link=https://datasheet.datasheetarchive.com/originals/distributors/Datasheets-DGA15/760686.pdf, Geometry.Height=15.6mm, Manufacturer_Part_Number=031-5431-10RFX, Mouser Price/Stock=https://www.mouser.co.uk/ProductDetail/Amphenol-RF/031-5431-10RFX?qs=py4qCovljJ8doXL0muNs1w%3D%3D
R1 R2 R3 R4 R5 R6 R7 R27: library part CMP-2000-03379-3, "RES SMD 47K OHM 1% 1/10W 0603", Case Code (Imperial)=0603, Case Code (Metric)=1608, Max Operating Temperature=155°C, Max Power Dissipation=100mW, Min Operating Temperature=-55°C, Package Quantity=5000, Resistance=47kR, Resistance Tolerance=1%, Resistor Type="Thick Film", Temperature Coefficient=100ppm/°C, Voltage Rating=75V, Case/Package=0603, Construction=Rectangular, Contact Plating=Tin, Depth=0.85mm, Features="Automotive AEC-Q200", Height=0.45mm, Lead Free="Lead Free", Length=1.55mm, Military Standard=Not, Mount="Surface Mount", Number of Terminations=2, Packaging="Tape and Reel", Power Rating=100mW, Radiation Hardening=No, RoHS Compliant=Yes, Series=CRCW, Size Code=0603, Technology="THICK FILM", Termination=SMD/SMT, Tolerance=1%, Voltage Rating (DC)=75V, Weight=7.1E-05oz, Width=0.85mm
R8 R9 R10 R11 R12 R26 R28 R29: library part CMP-02407-012292-2, "RES 0 OHM JUMPER 1/10W 0603", Case/Package=Molded, Max Operating Temperature=155°C, Min Operating Temperature=-55°C, Power Rating=100mW, Resistance=22R, Resistor Type="Thick Film", Contact Plating=Tin, Lead Free="Lead Free", Length=1.55mm, Mount="Surface Mount", RoHS Compliant=Yes, Termination=Wraparound
R13 R14 R15 R31: library part CMP-1666-00005-4, "Chip Resistor, 10 KOhm, +/- 1%, 100 mW, -55 to 155 degC, 0603 (1608 Metric), RoHS, Tape and Reel", Manufacturer="Vishay Semiconductor", Max Operating Temperature="155 degC", Min Operating Temperature="-55 degC", Package Quantity=5000, Voltage Rating="75 V", ComponentLink1Description="Manufacturer URL", ComponentLink1URL=http://www.vishay.com/, ComponentLink2Description=Datasheet, ComponentLink2URL=https://datasheet.ciiva.com/11809/0900766b80d98afc-11809037.pdf, DatasheetVersion=06/2012, Height="0.45 mm", Length="1.55 mm", Mounting Technology="Surface Mount", PackageDescription="2-Pin Surface Mount Device, Body 1.575 x 0.85 mm", PackageReference=0603, Packaging="Tape and Reel", REACH SVHC=Unknown, RoHSCompliant=true
R16 R25: library part CMP-1666-00003-5, "RES Thick Film, 1kΩ, 1%, 0.1W, 100ppm/°C, 0603", Case Code (Imperial)=0603, Case Code (Metric)=1608, Max Operating Temperature=155°C, Max Power Dissipation=100mW, Min Operating Temperature=-55°C, Package Quantity=10, Resistance=1kR, Temperature Coefficient=100ppm/°C, Tolerance=1%, Voltage Rating=75V, Case/Package=0603, Composition="Thick Film", Contact Plating=Tin, Depth=0.85mm, Features="Automotive AEC-Q200", Height=0.45mm, Lead Free="Lead Free", Length=1.55mm, Military Standard=Not, Mount="Surface Mount", Number of Pins=2, Number of Terminations=2, Packaging="Tape and Reel", Power Rating=100mW, Radiation Hardening=No, Termination=SMD/SMT, Voltage Rating (DC)=75V, Weight=7.1E-05oz, Width=0.033inch
R30 R32: library part CMP-2000-03824-5, "Chip Resistor, 100 Ohm, +/- 1%, 100 mW,-55 to 155 degC, 0603 (1608 Metric), RoHS, Tape and Ree", Manufacturer="Vishay Semiconductor", ComponentLink1Description="Manufacturer URL", ComponentLink1URL=http://www.vishay.com/, ComponentLink2Description=Datasheet, ComponentLink2URL=http://www.vishay.com/docs/20035/dcrcwe3.pdf, DatasheetVersion=06/2012, Mounting Technology="Surface Mount", PackageDescription="2-Pin Surface Mount Device, Body 1.575 x 0.85 mm", PackageReference=0603
R33: library part CMP-2000-02999-1, Manufacturer="Vishay Dale", Part Number=CRCW06031K58FKEA
SW1 SW2: library part CMP-1684-00021-1, "Tact Switch, SPST-NO, 0.05 A, -35 to 85 degC, 4-Pin THD, RoHS, Bulk", Actuator Color=Black, Contact Rating @ Voltage=0.05A@24VDC, Dielectric Strength=500VAC, Manufacturer="TE Connectivity", Maximum AC Voltage Rating=N/A, Maximum Contact Resistance=100mOhm, Maximum DC Voltage Rating=24V, Minimum Insulation Resistance=100MOhm, Operating Temperature=-35to85C, Package Description="4-Pin Through Hole Device, Body 5.99 x 5.99 mm, Pitch 6.5 mm", Package Reference=THD, Actuator Length=1.4mm, Actuator Material=PolybutyleneTerephthalate, Actuator Style=RoundButton, Base Material=N/A, Body Orientation=Straight, Bushing Type=Unthreaded, Contact Material=CopperAlloy, Contact Plating=Silver, Datasheet URL=http://www.te.com/commerce/DocumentDelivery/DDEController?Action=showdoc&DocId=Customer+Drawing%7F1825910%7FC9%7Fpdf%7FEnglish%7FENG_CD_1825910_C9.pdf%7F1825910-6, Datasheet Version="Rev. C9", Dimension=5.99x5mm, Electrical Life=100000Cycles, Family=1825910, Function=MomentaryContact, Housing Material=N/A, Illumination=N/R, Manufacturer URL=http://www.te.com, Mechanical Life=100000Cycles, Mounting=ThroughHole, Packaging=N/A, Part No=1825910-6, Pole Throw Configuration=SPST, Product Weight=N/A, RoHS=Yes, Seal Description=N/A, Seal Location=N/A, Switch Configuration=OFF(ON), Terminal Type=PCPins, Thread Size=N/R
U1: library part CMP-12105-000007-1, "IC MCU 32BIT 512KB FLASH 64LQFP", Ambient Temperature Range High=+85°C, Ambient Temperature Range Low=-40°C, Frequency=180MHz, Manufacturer=ST, Max Junction Temp=+105°C, Max Supply Voltage=3.6V, Min Supply Voltage=1.7V, Package=LQFP64-5W, Temperature="-40°C to +105°C", Automotive=No, Category=IC, ComponentLink2Description=Datasheet, ComponentLink2URL=https://www.st.com/en/microcontrollers-microprocessors/stm32f446re.html, Core Architecture="ARM Cortex-M4", Data Bus Width=32bits, Device Class L1="Integrated Circuits (ICs)", Device Class L2="Embedded Processors and Controllers", Device Class L3=Microcontrollers, Digikey Description="IC MCU 32BIT 512KB FLASH 64LQFP", Height=1.6mm, Interface=I2C,SPI,UART,USART,CAN,USB,LIN,IrDA,I2S,Other, Ipc Land Pattern Name=QFP50P1200X1200X160-64, Lead Free=Yes, Manufacturer Part Number=STM32F446RET6, Memory Size=512KBytes, Memory Type=FLASH, Mouser Description="ARM Microcontrollers - MCU High-performance and DSP with FP, ARM Cortex-M4 MCU with 512 Kbytes Flash, 180 MHz CPU, Art Accelerator, SDRAM", Number Of A/D Converters=3, Number Of Adc Channels=16, Number Of Cores=1, Number Of I2C Channels=4, Number Of I/Os=50, Number Of Pwm Channels=32, Number Of Spi Channels=4, Number Of Timers/Counters=14, Number Of Uart Channels=6, Number Of Usb Channels=2, Octopart=https://octopart.com/stm32f446ret6-stmicroelectronics-52642920, Ram Size=128KBytes, RoHS=TRUE, Standoff Height=0.05mm, Temperature Range High=+105°C, Temperature Range Low=-40°C
U2: library part CMP-0395-00503-2, "Single Output LDO, 1 A, Fixed 3.3 V Output, 2 to 5.5 V Input, 4-pin SOT-223 (DCY), -40 to 125 degC, Green (RoHS & no Sb/Br)", Manufacturer="Texas Instruments", Accuracy(%)=2, Code_JEDEC=TO-261, ComponentLink1Description="Manufacturer URL", ComponentLink1URL=http://www.ti.com/, ComponentLink2Description=Datasheet, ComponentLink2URL=http://www.ti.com/general/docs/lit/getliterature.tsp?genericPartNumber=TLV1117LV33&fileType=pdf, ComponentLink3Description="Package Specification", ComponentLink3URL=http://www.ti.com/litv/pdf/mpds094a, DatasheetVersion=SBVS160A, Eco-Plan="Green (RoHS & no Sb/Br)", Fixed Output Options(V)=3.3, Iout(Max)(A)=1, Iq(Typ)(mA)=0.05, Mounting Technology="Surface Mount", PackageDescription="4-Pin Plastic Small Outline, Body 3.5 x 6.5 mm, Pitch 2.3 mm", PackageReference=DCY0004A, PackageVersion=4202506/B, PartNumber=TLV1117LV33DCYR, SubFamily="Single Channel LDO", Vdo(Typ)(mV)=1200, Vin(Max)(V)=5.5, Vin(Min)(V)=2, Vout Adj(Max)(V)=3.3, Vout Adj(Min)(V)=3.3
U3: library part CMP-04895-000147-1, "IC OPAMP GP 1 CIRCUIT SC70-5", RoHS Compliant=Yes
X1: library part CMP-2000-05036-1, "Low Frequency Crystal, 32.768 KHz, 6 pF, +/- 20 ppm, -40 to 85 degC, 4-Pin SMD, RoHS, Tape and Reel", Case Height=2.5mm, Case Length=8mm, Case Width=3.8mm, Frequency=32.768kHz, Load Capacitance=6pF, Manufacturer=Abracon, Operating Temperature Range=-40Cto+85C, Package / Case=8mmx3.8mm, Package Description="4-Pin Surface Mount Device, Body 8 x 3.8 mm, Pitch 5.5 mm", Package Reference=ABS25, Tolerance=20PPM, Brand=ABRACON, Datasheet URL=https://datasheet.ciiva.com/854/abs25-854528.pdf, Datasheet Version=Jun-17, Dimensions=3.8mmWx8mmLx2.5mmH, ESR=50kOhms, Factory Pack Quantity=3000, Manufacturer URL=http://www.abracon.com/, Mounting Style=SMD/SMT, Packaging=Reel, Product Category=Crystals, RoHS=Details, Series=ABS25, Termination Style=SMD/SMT, Type=LowFrequencyCrystal
X2: "Standard Clock Oscillators 8MHz 3.3V -40C +125C AEC-Q100", Manufacturer_Name=SiTime, Mouser Part Number=788-2024BA-S2-33E-8G, Datasheet Link=https://componentsearchengine.com/Datasheets/1/SiT2024BA-S2-33E-8.000000G.pdf, Geometry.Height=1.45mm, Manufacturer_Part_Number=SiT2024BA-S2-33E-8.000000G, Mouser Price/Stock=https://www.mouser.com/Search/Refine.aspx?Keyword=788-2024BA-S2-33E-8G

## Free pads (board coordinates)
  round 0 hole 125.98 unplated: 2(2598.43,1500) 2(2598.43,4846.46) 2(5137.8,1500) 2(5137.8,4846.46)

## Via types
v1: diameter 24, hole 12, Top Layer to Bottom Layer, tented both sides, 57 vias
v2: diameter 50, hole 28, Top Layer to Bottom Layer, tented both sides, 26 vias
v3: diameter 25, hole 12, Top Layer to Bottom Layer, tented both sides, 7 vias
v4: diameter 50, hole 28, Top Layer to Bottom Layer, tented top, 1 vias

## Nets (pads, with @x,y where several pads share a name; then routed paths per layer and width w, separated by ;. In a path a pad name is that pad's centre, name@x,y a point inside that pad or via, vN(x,y) a via of type N, cw(c..) or ccw(c..) an arc to the next point about the centre after c; other vN are vias at no path point)
+3.3V: C1.1 C2.1 C5.1 C7.1 C8.1 C9.1 C10.1 C11.1 C23.1 C24.1 C25.1 C26.2 C30.1 C34.2 D2.2 FB2.1 J1.4 R1.1 R2.1 R3.1 R4.1 R5.2 R6.2 R7.2 R8.2 R10.1 R11.1 R13.2 R14.2 R27.1 R31.2 U1.19 U1.32 U1.48 U1.64 U2.2 U2.4 U3.5 X2.4 | length 2695.8
  Top Layer w7.87: U3.5 2791.34,2968.5 2818.9,2940.95 2897.64,2940.95 2925.2,2968.5 C34.2 ; C30.1 X2.4
  Top Layer w11.81: U1.64 4606.3,3088.58 C9.1 ; U1.19 4645.67,2568.41 4672.24,2541.83 C5.1@4672.24,2501.48 ; U1.32 4901.57,2585.66 4908.49,2578.74 5000,2578.74 5027.56,2551.18 C11.1 ; U1.48 C10.1
  Top Layer w39.37: v2(3551.18,2736.22) R14.2 ; v2(3716.54,2582.68) R31.2 ; R27.1 3857.05,3160.2 v4(3858.27,3161.42) ; X2.4 4035.43,2586.61 4039.37,2590.55 4087.67,2590.55 4111.3,2614.17 v2(4114.17,2614.17) ; R10.1 4219.57,2505.91 FB2.1 v2(4330.71,2449.8) ; R11.1 v2(4395.67,3417.32) ; v2(4446.85,4218.5) R8.2 ; v2(4551.18,3248.03) C8.1 C9.1 ; C7.1 4562.01,2453.74 v2(4562.99,2452.76) ; v2(4663.39,4831.69) 4663.88,4831.2 4663.88,4752.46 J1.4 ; C5.1 4730.81,2501.48 v2(4732.28,2500) ; R13.2 v2(4732.28,3409.45) ; R7.2 4821.85,4162.4 v2(4822.83,4161.42) ; C11.1 5027.56,2455.71 v2(5028.54,2454.72) ; C10.1 v2(5094.49,3051.18)
  Bottom Layer w39.37: v2(4381.89,4503.94) 4382.87,4504.92 R1.1 ; v2(4476.38,4503.94) R2.1 ; v2(4566.93,4503.94) 4567.91,4504.92 R3.1 ; v2(4663.39,4831.69) C2.1 4716.54,4832.68 C1.1 ; R4.1 4723.43,4504.92 v2(4724.41,4503.94) ; v2(4811.02,4503.5) 4812.01,4504.49 R5.2 ; v2(4905.51,4503.5) R6.2
  other v2: 3492.13,2003.94 3492.13,2161.42 3488.19,2322.83
+5V: C18.1 C19.2 C20.1 C21.1 C22.1 FB1.2 U2.3 | length 14.5
  Top Layer w7.87: C21.1@4043.31,1746.85 C21.1 C21.1@4047.24,1753.15 ; C20.1@4043.31,1909.45 C20.1
ADC1_IN0: U1.10 U3.3 U3.4 | length 2734.4
  Top Layer w7.87: U3.4 v1(2740.16,2775.59) 2685.04,2775.59 2657.48,2803.15 2657.48,3133.86 2673.23,3149.61 2728.35,3149.61 2740.16,3137.8 U3.3 ; v3(4440.94,2814.96) U1.10
  Bottom Layer w7.87: v1(2740.16,2775.59) 2775.59,2740.16 3440.94,2740.16 3492.13,2688.98 3633.86,2688.98 3759.84,2814.96 4027.56,2814.96 4078.74,2763.78 4173.23,2763.78 4224.41,2814.96 v3(4440.94,2814.96)
GND: BT1.2 C1.2 C2.2 C3.2 C4.1 C5.2 C7.2 C8.2 C9.2 C10.2 C11.2 C12.2 C13.2 C14.2 C15.2 C16.2 C17.2 C18.2 C19.1 C20.2 C21.2 C22.2 C23.2 C24.2 C25.2 C26.1 C27.2 C28.2 C30.2 C33.2 C34.1 J1.6 J1.11 J1.12 J2.5 J3.1 R9.1 R15.1 R16.2 R25.1 R30.2 R32.2 SW1.3 SW1.4 SW2.1 SW2.2 U1.12 U1.18 U1.31 U1.47 U1.63 U2.1 U3.2 X2.1 | length 4414.4
  Top Layer w7.87: U3.2 2766.73,3093.12 v1(2766.73,3227.36) 2767.72,3228.35 2767.72,3362.2 2967.72,3562.2 J3.1 ; v2(2901.57,3224.41) 2925.2,3200.79 C34.1 ; v1(3019.68,2181.1) R32.2 ; C33.2 v1(3137.8,3374.02) ; v1(3177.17,3003.94) 3275.59,3003.94 SW2.1 ; C14.2 3303.15,3346.46 3277.56,3320.87 SW2.2 SW2.1 ; C13.2 3444.88,2933.07 3386.81,2991.14 3288.39,2991.14 SW2.1 ; v1(3472.44,3669.29) 3473.43,3668.31 3567.91,3668.31 SW1.3 SW1.4 ; U2.1@3566.93,1691.93 U2.1 ; v1(3570.87,3192.91) R30.2 ; v1(3870.08,2657.48) X2.1 ; v1(4173.23,2704.72) C28.2 ; C27.2 v1(4173.23,3326.77) ; C4.1 4326.77,2728.35 v1(4326.77,2779.53) 4329.83,2776.47 4384.95,2776.47 4405.51,2755.91 C3.2 ; J1.11 4351.69,4895.36 4410.74,4895.36 v1(4443.9,4862.2) ; v1(4437.01,2477.36) 4478.35,2518.7 C7.2 ; v1(4460.63,3177.17) C8.2 ; v1(4523.62,4048.23) 4523.62,4122.05 R9.1 ; R15.1 v1(4570.87,3401.57) ; C5.2 4625.98,2500 v1(4625.98,2452.76) ; v1(4625.98,3011.81) U1.63 4625.98,3118.11 4653.54,3145.67 C9.2 ; v1(4645.67,2114.17) R25.1 ; J1.6 4752.19,4753.18 4752.19,4791.56 4757.87,4797.24 4788.39,4797.24 v1(4808.07,4816.93) 4812.43,4816.93 4834.34,4838.83 4851.63,4838.83 J1.12 ; v2(4948.82,2449.8) 4953.85,2449.8 4980.31,2476.27 C11.2 ; U1.47 5015.75,2972.44 5043.31,2944.88 C10.2 v1(5094.49,2901.57)
  Top Layer w11.81: U1.12 v1(4586.61,2775.59) ; C5.2 4625.98,2502.95 U1.18 ; U1.31 4881.89,2573.82 4901.57,2554.13 C12.2 C11.2
  Top Layer w19.68: R16.2 v3(3740.16,2448.82) ; C18.2 3992.13,2330.71 4035.43,2374.02 C30.2
  Bottom Layer w7.87: v1@2767.22,3227.85 v1(2766.73,3227.36) 2768.21,3225.89 2900.1,3225.89 v2(2901.57,3224.41) ; 2767.22,3361.71 2767.72,3362.2 ; C2.2 4764.76,4833.66 4791.13,4833.66 4807.86,4816.93 v1(4808.07,4816.93) ; C1.2 4765.75,4913.39 v1(4811.02,4913.39)
  other v1: 3940.94,1610.24 3858.27,1748.03 4409.45,1771.65 3877.95,1901.57 4460.63,1905.51 4476.38,2055.12 3877.95,2062.99
  other v3: 3578.74,1629.92 3314.96,1866.14 3236.22,2007.87 3255.91,2157.48 3255.91,2307.09
GND_Detect: H1.11 R32.1 | length 127.1
  Top Layer w7.87: R32.1 3019.68,2430.32 H1.11
"MCU BOOT0": R13.1 R15.2 U1.2@4685.04,3070.87 | length 431.8
  Top Layer w7.87: R15.2 4622.05,3296.26 4685.04,3233.27 ; U1.2@4685.04,3070.87 4685.04,3118.11 4712.6,3145.67 4712.6,3205.71 4685.04,3233.27 ; R13.1@4685.04,3340.55 4685.04,3233.27
"MCU VCAP1": C12.1 U1.30 | length 109.8
  Top Layer w11.81: C12.1 4837.6,2522.64 4837.6,2554.1 4862.2,2578.71 U1.30
MCU_LED_A: D1.2 U1.21 | length 435
  Top Layer w7.87: D1.2 4659.45,2377.95 4744.09,2377.95 4773.62,2407.48 v1(4773.62,2408.46) ; U1.21 4685.04,2577.76 4704.72,2558.07 v1(4774.61,2558.07)
  Bottom Layer w7.87: v1(4773.62,2408.46) 4774.11,2408.96 4774.11,2557.58 v1(4774.61,2558.07)
MCU_LED_C: D1.1 R25.2 | length 57.1
  Top Layer w7.87: R25.2 D1.1
MCU_NRST: C13.1 C14.1 H1.12 R14.1 SW2.3 SW2.4 U1.7 | length 2357.2
  Top Layer w7.87: H1.12 3022.44,2782.28 3094.49,2854.33 R14.1 ; C14.1 3425.2,3346.46 3452.76,3318.9 3452.76,3259.84 SW2.4 SW2.3 3509.84,3001.97 3551.18,2960.63 R14.1 ; v1(4090.55,2858.27) 3555.12,2858.27 R14.1 ; v1(4381.89,2870.08) 4401.57,2889.76 4456.69,2889.76 4472.44,2874.02 U1.7
  Bottom Layer w7.87: v1(4090.55,2858.27) 4338.37,2858.27 4350.18,2870.08 v1(4381.89,2870.08)
MCU_OSC_IN: U1.5 X2.5 | length 651.2
  Top Layer w7.87: X2.5 4192.91,2657.48 4228.35,2692.91 4228.35,2783.46 4358.27,2913.39 U1.5
MCU_PUSH_BUTTON: R26.1 U1.2@4527.56,2972.44 | length 1158.9
  Top Layer w7.87: R26.1 3856.38,3533.39 3940.94,3448.82 4204.72,3448.82 4239.17,3414.37 4239.17,3099.41 4366.14,2972.44 U1.2@4527.56,2972.44
MCU_SWCLK: U1.49 | length 2686.4
  Top Layer w7.87: 2872.44,2593.31 2874.02,2594.88 2874.02,2678.92 2889.76,2694.67 v1(2889.76,2696.85) ; U1.49 4901.57,3118.11 v1(4933.07,3149.61)
  Bottom Layer w7.87: v1(2889.76,2696.85) 3425.2,2696.85 3460.63,2661.42 3653.54,2661.42 3748.03,2755.91 4043.31,2755.91 4145.67,2653.54 4381.89,2653.54 4692.91,2964.57 4854.33,2964.57 4992.13,3102.36 4992.13,3137.8 4980.31,3149.61 v1(4933.07,3149.61)
MCU_SWDIO: U1.46 | length 2413.3
  Top Layer w7.87: 2822.44,2593.31 2822.44,2775.2 2960.63,2913.39 v1(3055.12,2913.39) ; v1(4586.61,2944.88) 4590.98,2944.88 4598.85,2952.76 U1.46
  Bottom Layer w7.87: v1(3055.12,2913.39) 4555.12,2913.39 v1(4586.61,2944.88)
MCU_SWO: U1.55 | length 2246.3
  Top Layer w7.87: 2922.44,2593.31 2925.2,2596.06 v1(2925.2,2807.09) ; v1(4767.72,3000) 4783.46,3015.75 U1.55
  Bottom Layer w7.87: v1(2925.2,2807.09) 2955.44,2837.33 4047.24,2837.33 4085.36,2799.21 4165.35,2799.21 4203.47,2837.33 4408.2,2837.33 4429.13,2858.27 4547.24,2858.27 4688.98,3000 v1(4767.72,3000)
NetBT1_1: BT1.1 R12.1 | length 1013.7
  Top Layer w7.87: BT1.1@3768.9,3844.09 BT1.1@3868.9,3844.09
  Top Layer w11.81: BT1.1@3868.9,3844.09 3868.9,3755.12 3934.06,3689.96 4229.33,3689.96 4481.3,3437.99 R12.1@4481.3,3357.07
NetC3_1: C3.1 C4.2 FB2.2 R10.2 U1.13 | length 462.8
  Top Layer w7.87: R10.2 4327.83,2556.18 FB2.2 4330.71,2673.23 C4.2 C3.1@4403.54,2675.2 ; C3.1@4408.46,2677.17 4485.24,2753.94 4525.59,2753.94 U1.13
NetC27_1: C27.1 R28.2 X1.1 | length 340
  Top Layer w7.87: X1.1 4051.18,3035.43 4130.98,3115.24 R28.2 C27.1 ; R28.2@4187.25,3129.25 R28.2@4188.15,3129.25
NetC28_1: C28.1 R29.2 X1.4 | length 304.2
  Top Layer w7.87: X1.4 3976.38,2906.42 3998.03,2884.76 4055.12,2884.76 4066.93,2896.57 4115.24,2896.57 4127.05,2884.76 R29.2 C28.1
NetC29_1: C29.1 R26.2 R27.2 SW1.1 SW1.2 | length 573.6
  Top Layer w7.87: R27.2 3745.08,3219.49 C29.1 3746.06,3312.99 SW1.2 SW1.1 3850.55,3667.32 R26.2@3862.2,3655.67 ; R26.2@3856.22,3661.34 R26.2
NetC29_2: C29.2 R30.1 | length 127.4
  Top Layer w7.87: R30.1 3571.85,3312.01 C29.2
NetC33_1: C33.1 R33.2 U3.1 | length 538.1
  Top Layer w7.87: U3.1 2791.34,3185.04 2917.32,3311.02 3035.43,3311.02 3066.93,3342.52 C33.1 R33.2
NetJ1_10: J1.10 R8.1 R9.2 | length 215.6
  Top Layer w7.87: J1.10 R8.1 4581.69,4123.11 R9.2
NetJ2_2: J2.2 J2.3 | length 25.6
  Top Layer w11.81: J2.2 J2.3
NetJ3_2: J3.2 R33.1 | length 138.9
  Top Layer w7.87: R33.1 3067.72,3496.85 J3.2
NetR31_1: R31.1 X2.3 | length 84.6
  Top Layer w7.87: R31.1 X2.3
OSC_32_IN: R28.1 U1.3 | length 420.4
  Top Layer w7.87: R28.1 4173.23,3019.68 4240.16,2952.76 U1.3
OSC_32_OUT: R29.1 U1.4 | length 358
  Top Layer w7.87: R29.1 4182.16,2933.07 U1.4
PWR_LED_C: D2.1 R16.1
SDIO_CD: J1.9 R7.1 | length 110.7
  Top Layer w7.87: R7.1 4765.52,4337.37 J1.9
SDIO_CLK: J1.5 R4.2 U1.53 | length 1886.3
  Top Layer w7.87: v1(4707.68,4682.86) J1.5 ; U1.53 v1(4822.83,3176.22)
  Bottom Layer w7.87: v1(4707.68,4682.86) 4723.43,4667.11 R4.2 4683.3,4625.23 4669.29,4611.22 4669.29,4174.21 4939.96,3903.54 4939.96,3293.35 v1(4822.83,3176.22)
SDIO_CMD: J1.3 R3.2 U1.54 | length 1855.9
  Top Layer w7.87: v1(4621.06,4678.15) J1.3 ; v1(4759.84,3655.51) 4783.46,3631.89 4783.46,3149.61 4803.15,3129.92 4803.15,3120.08 U1.54
  Bottom Layer w7.87: v1(4621.06,4678.15) 4620.46,4678.15 4599.2,4656.9 4599.2,4656.36 4568.45,4625.61 R3.2 4527.94,4625.61 4521.65,4619.32 4521.65,4181.1 4760.83,3941.93 4760.83,3656.5 v1(4759.84,3655.51)
SDIO_DAT0: J1.7 R5.1 U1.39 | length 2365
  Top Layer w7.87: v1(4794.29,4682.09) J1.7 ; U1.39 5173.23,2814.96 5204.72,2846.46 5204.72,3088.58 v1(5100.39,3192.91)
  Bottom Layer w7.87: v1(4794.29,4682.09) 4812.01,4664.37 R5.1 4772.33,4625 4767.72,4620.39 4767.72,4425.2 5016.73,4176.18 5016.73,3276.57 v1(5100.39,3192.91)
SDIO_DAT1: J1.8 R6.1 U1.40 | length 2299.9
  Top Layer w7.87: J1.8@4849.41,4759.84 4837.6,4748.03 4837.6,4730.32 4849.41,4718.5 4851.38,4718.5 v1(4879.92,4689.96) ; U1.40 5149.29,2834.65 5169.29,2854.65 v1(5169.29,2940.94)
  Bottom Layer w7.87: v1(4879.92,4689.96) 4905.51,4664.37 R6.1 4875.98,4625 4861.22,4610.24 4861.22,4414.37 5169.29,4106.3 v1(5169.29,2940.94)
SDIO_DAT2: J1.1 R1.2 U1.51 | length 2168
  Top Layer w7.87: v1@4481.3,4735.24 4477.36,4739.17 v1(4477.36,4743.11) 4533.46,4743.11 J1.1 4534.45,4751.11 J1.1@4522.64,4762.92 ; U1.51 4862.2,3124.33 4889.76,3151.89 v1(4889.76,3334.65)
  Bottom Layer w7.87: v1(4477.36,4743.11) 4415.35,4743.11 4382.94,4710.7 4382.94,4626.05 R1.2 4317.91,4625.98 4298.23,4606.3 4298.23,3926.18 v1(4889.76,3334.65)
SDIO_DAT3: J1.2 R2.2 U1.52 | length 2075
  Top Layer w7.87: v1(4476.38,4687.01) 4570.19,4687.01 4577.76,4694.57 J1.2 ; v1(4826.77,3455.71) 4826.77,3289.29 4870.08,3245.98 4870.08,3157.48 4842.52,3129.92 U1.52
  Bottom Layer w7.87: v1(4476.38,4687.01) R2.2 4436.63,4625.61 4429.13,4618.11 4429.13,4433.07 4338.58,4342.52 4338.58,3988.19 4827.76,3499.02 4827.76,3456.69 v1(4826.77,3455.71)
USART_RX: H1.13 U1.17 | length 1654.9
  Top Layer w7.87: H1.13 3072.44,2473.43 3083.07,2484.06 3121.85,2484.06 v1(3149.61,2511.81) ; v1(4448.82,2570.87) 4594.49,2570.87 4606.22,2582.6 4606.22,2618.03 U1.17
  Bottom Layer w7.87: v1(3149.61,2511.81) 3154.42,2511.81 3178.04,2535.43 4413.39,2535.43 v1(4448.82,2570.87)
USART_TX: H1.14 U1.16 | length 1568.5
  Top Layer w7.87: H1.14 3072.44,2623.23 3083.07,2633.86 v1(3208.66,2633.86) ; v1(4413.39,2618.11) 4492.13,2696.85 U1.16@4527.56,2696.85
  Bottom Layer w7.87: v1(3208.66,2633.86) 3209.65,2634.84 3786.42,2634.84 3850.39,2570.87 4366.14,2570.87 v1(4413.39,2618.11)
VBAT: R11.2 R12.2 U1.1 | length 824
  Top Layer w11.81: R11.2 4326.77,3299.21 4291.34,3263.78 4291.34,3208.66 ; R12.2 4480.31,3263.78 4468.5,3251.97 4334.65,3251.97 4291.34,3208.66 ; U1.1 4377.95,2992.13 4291.34,3078.74 4291.34,3208.66
VBUS: C15.1 C16.1 C17.1 FB1.1 J2.1
pads on no net: H1.01 H1.02 H1.03 H1.04 H1.05 H1.06 H1.07 H1.08 H1.09 H1.10 J2.4 J2.6 J2.7 J2.8 J2.9 J2.10 J2.11 J3.3 J3.4 U1.6 U1.8 U1.9 U1.11 U1.14 U1.15 U1.20 U1.22 U1.23 U1.24 U1.25 U1.26 U1.27 U1.28 U1.29 U1.33 U1.34 U1.35 U1.36 U1.37 U1.38 U1.41 U1.42 U1.43 U1.44 U1.45 U1.50 U1.56 U1.57 U1.58 U1.59 U1.61 U1.62 X1.2 X1.3 X2.2
copper on no net: | length 264.2
  Top Layer w7.87: 2872.44,2433.07 2872.44,2336.22 2897.64,2311.02 v1(2921.26,2311.02) ; 2921.26,2431.89 2922.44,2433.07
  Top Layer w19.68: 2822.44,2433.07 2822.64,2432.87 2822.64,2326.97 v2(2822.83,2326.77)

## Polygon pours and split planes (outlines as drawn)
+5V on Top Layer "g" (solid, pour order 4): 4161.42,2240.16 4161.42,2190.7 ccw(c4159.07,2093.89) 4070.87,2133.86 4070.87,2123.45 4070.87,1838.58 4070.87,1507.87 4023.62,1460.63 3822.83,1460.63 3736.22,1547.24 3736.22,1748.03 3783.46,1748.03 3783.46,1580.02 3862.25,1507.87 3996.06,1507.87 4027.56,1539.37 4027.56,1669.29 4011.81,1685.04 4011.81,1846.46 4019.68,1854.33 4019.68,2003.94 4015.75,2007.87 4015.75,2157.48 4023.62,2165.35 4023.62,2240.16 cw(c4035.43,2240.16) 4035.43,2251.97 4149.61,2251.97 cw(c4149.61,2240.16)
PWR_LED_C on Top Layer "PWR_LED_C_L01_P010" (solid, pour order 10): 3472.44,2480.32 3629.92,2480.32 3629.92,2417.32 3472.44,2417.32
GND on Top Layer "GND_L01_P027" (solid, pour order 27): 4015.75,1578.74 3929.13,1578.74 3826.77,1681.1 3826.77,1834.65 3850.39,1858.27 3850.39,2188.98 cw(c3909.45,2188.98) 3909.45,2248.03 4000,2248.03 cw(c4000,2236.22) 4011.81,2236.22 4011.81,2206.36 cw(c3988.86,2206.35) 4005.09,2190.13 3978.01,2163.05 ccw(c4000.95,2140.1) 3968.5,2140.1 3968.5,1807.09 3960.63,1799.21 3960.63,1692.91 4015.75,1637.8
GND on Top Layer "GND_L01_P024" (solid, pour order 24): 4425.2,1590.55 4425.2,1665.35 cw(c4616.94,1645.32) 4458.71,1755.46 ccw(c4303.17,1889.75) 4500,1830.71 4500,1870.08 4500,2102.36 ccw(c4472.44,2102.36) 4472.44,2129.92 4393.7,2129.92 ccw(c4393.7,2106.3) 4370.08,2106.3 4370.08,1840.21 cw(c4337.63,1840.21) 4360.57,1817.27 4334.65,1791.34 4334.65,1748.03 4382.57,1700.11 cw(c4327.17,1644.71) 4405.51,1644.71 4405.51,1590.55 4421.26,1590.55
VBUS on Top Layer "VBUS_L01_P000" (solid, pour order 0): 4185.04,2244.09 4232.28,2244.09 cw(c4232.28,2141.73) 4334.65,2141.73 4334.65,1960.63 4330.71,1956.69 4330.71,1799.21 4322.83,1791.34 4322.83,1645.67 4322.83,1590.55 4303.15,1590.55 4303.15,1681.1 4275.59,1708.66 4275.59,1838.58 4275.59,2141.73 ccw(c4214.57,2135.83) 4220.47,2196.85 4185.04,2196.85
+3.3V on Top Layer "+3.3V_L01_P026" (solid, pour order 26): 3452.76,2492.13 3452.76,2421.26 ccw(c3480.31,2421.26) 3480.31,2393.7 3515.75,2393.7 cw(c3515.75,2370.08) 3539.37,2370.08 3539.37,2351.87 3539.37,1948.82 ccw(c3566.93,1948.82) 3566.93,1921.26 3716.54,1921.26 3712.6,1917.32 3712.6,1834.65 3401.57,1834.65 3401.57,1933.07 3381.89,1952.76 3381.89,2212.6 3385.83,2216.54 3385.83,2492.13 cw(c3393.7,2492.13) 3393.7,2500 3444.88,2500 cw(c3444.88,2492.13)
GND on Top Layer "GND_L01_P012" (solid, pour order 12): 3606.3,1744.09 3606.3,1606.3 cw(c3586.61,1606.3) 3586.61,1586.61 3578.06,1586.61 cw(c3578.06,1642.01) 3538.89,1602.84 3253.4,1888.33 cw(c3370.92,2005.85) 3204.72,2005.85 3204.72,2350.39 cw(c3255.9,2350.39) 3255.91,2401.57 3322.83,2401.57 cw(c3322.84,2366.14) 3358.27,2366.14 3358.27,1921.26 3393.7,1885.83 3393.7,1818.9 3468.5,1744.09
+3.3V on Top Layer "+3.3V_L01_P007" (solid, pour order 7): 3649.61,1665.35 3688.98,1665.35 3688.98,1762.07 3736.22,1807.09 3736.22,1940.95 3736.22,1992.13 3602.36,1992.13 3602.36,1807.09 3649.61,1764.5
+3.3V on Plane (+3.3V) (split plane): 5247.62,1394.11 2488.6,1394.11 2488.6,4956.28 5247.62,4956.28
GND on Plane (GND) (split plane): 5247.62,1394.11 2488.6,1394.11 2488.6,4956.28 5247.62,4956.28